# Altium PCB Flight Controller.PcbDoc (part 1 of 3)
Units mm, origin at the board's own origin, x right, y up, seen from the top; angles counter-clockwise.
Board outline 152.4 x 101.6 mm, 22 copper layers (F.Cu, F.Mask, B.Cu, B.Mask, In1.Cu, F.SilkS, In2.Cu, B.SilkS, In3.Cu, F.Adhes, In4.Cu, B.Adhes, F.Paste, B.Paste, Dwgs.User, Cmts.User, Eco1.User, Eco2.User, Edge.Cuts, Margin, B.CrtYd, F.CrtYd); 168 components, 0 nets, 572 pads, 361 vias.
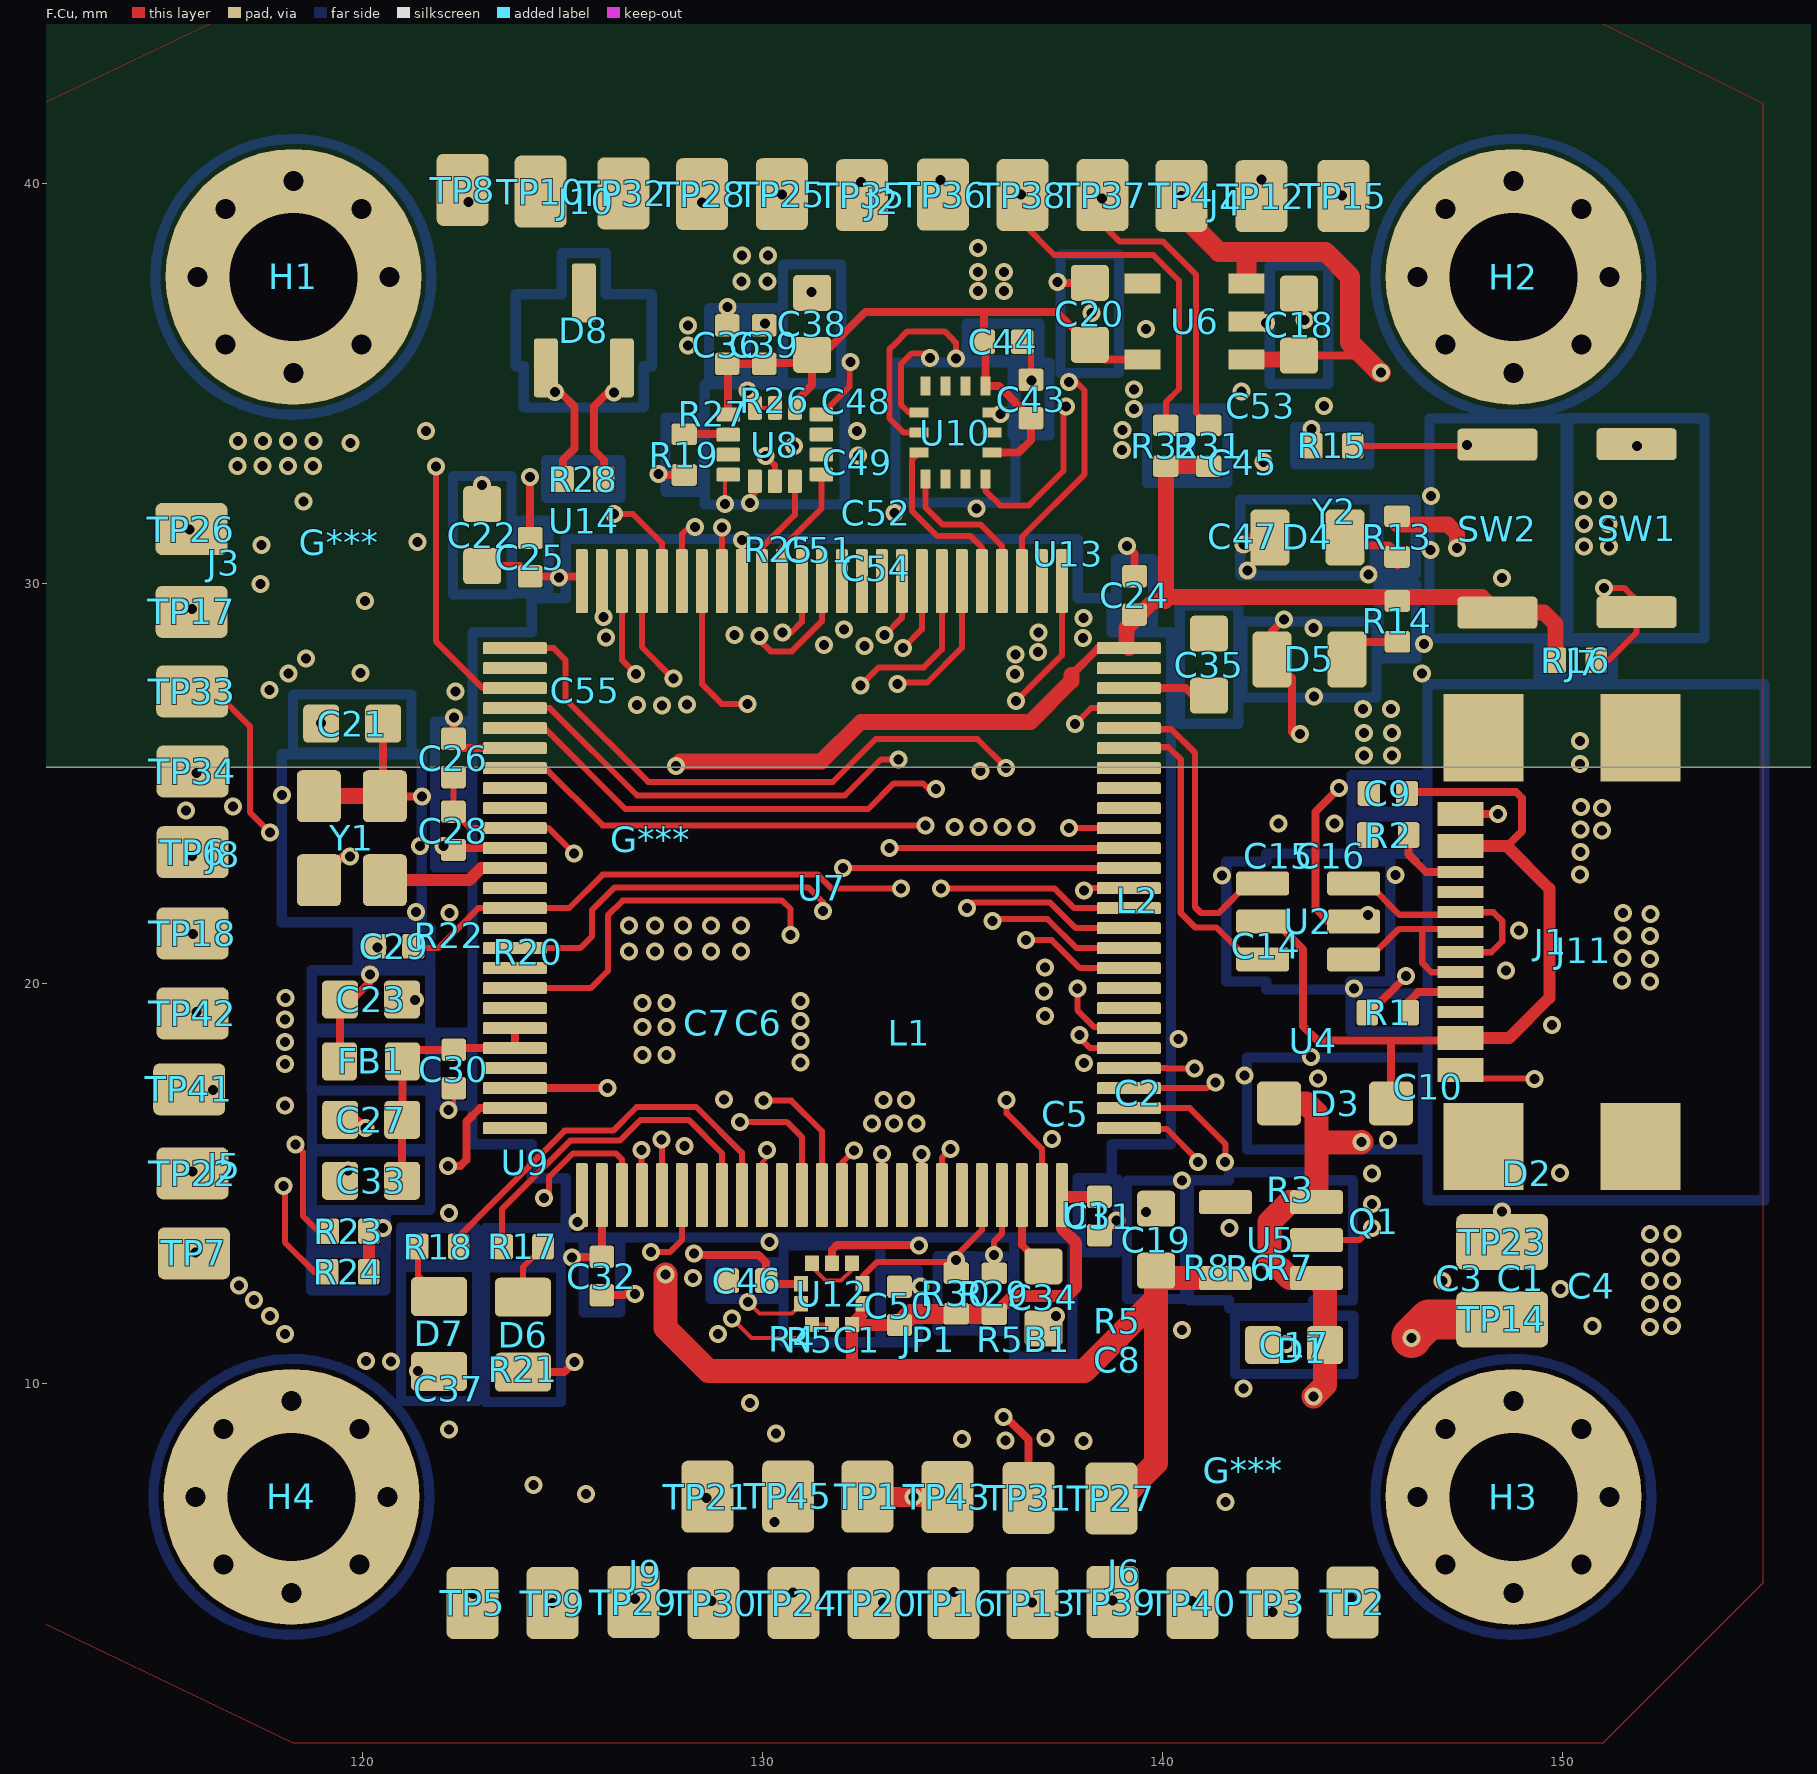
[diagram p0: F.Cu view]
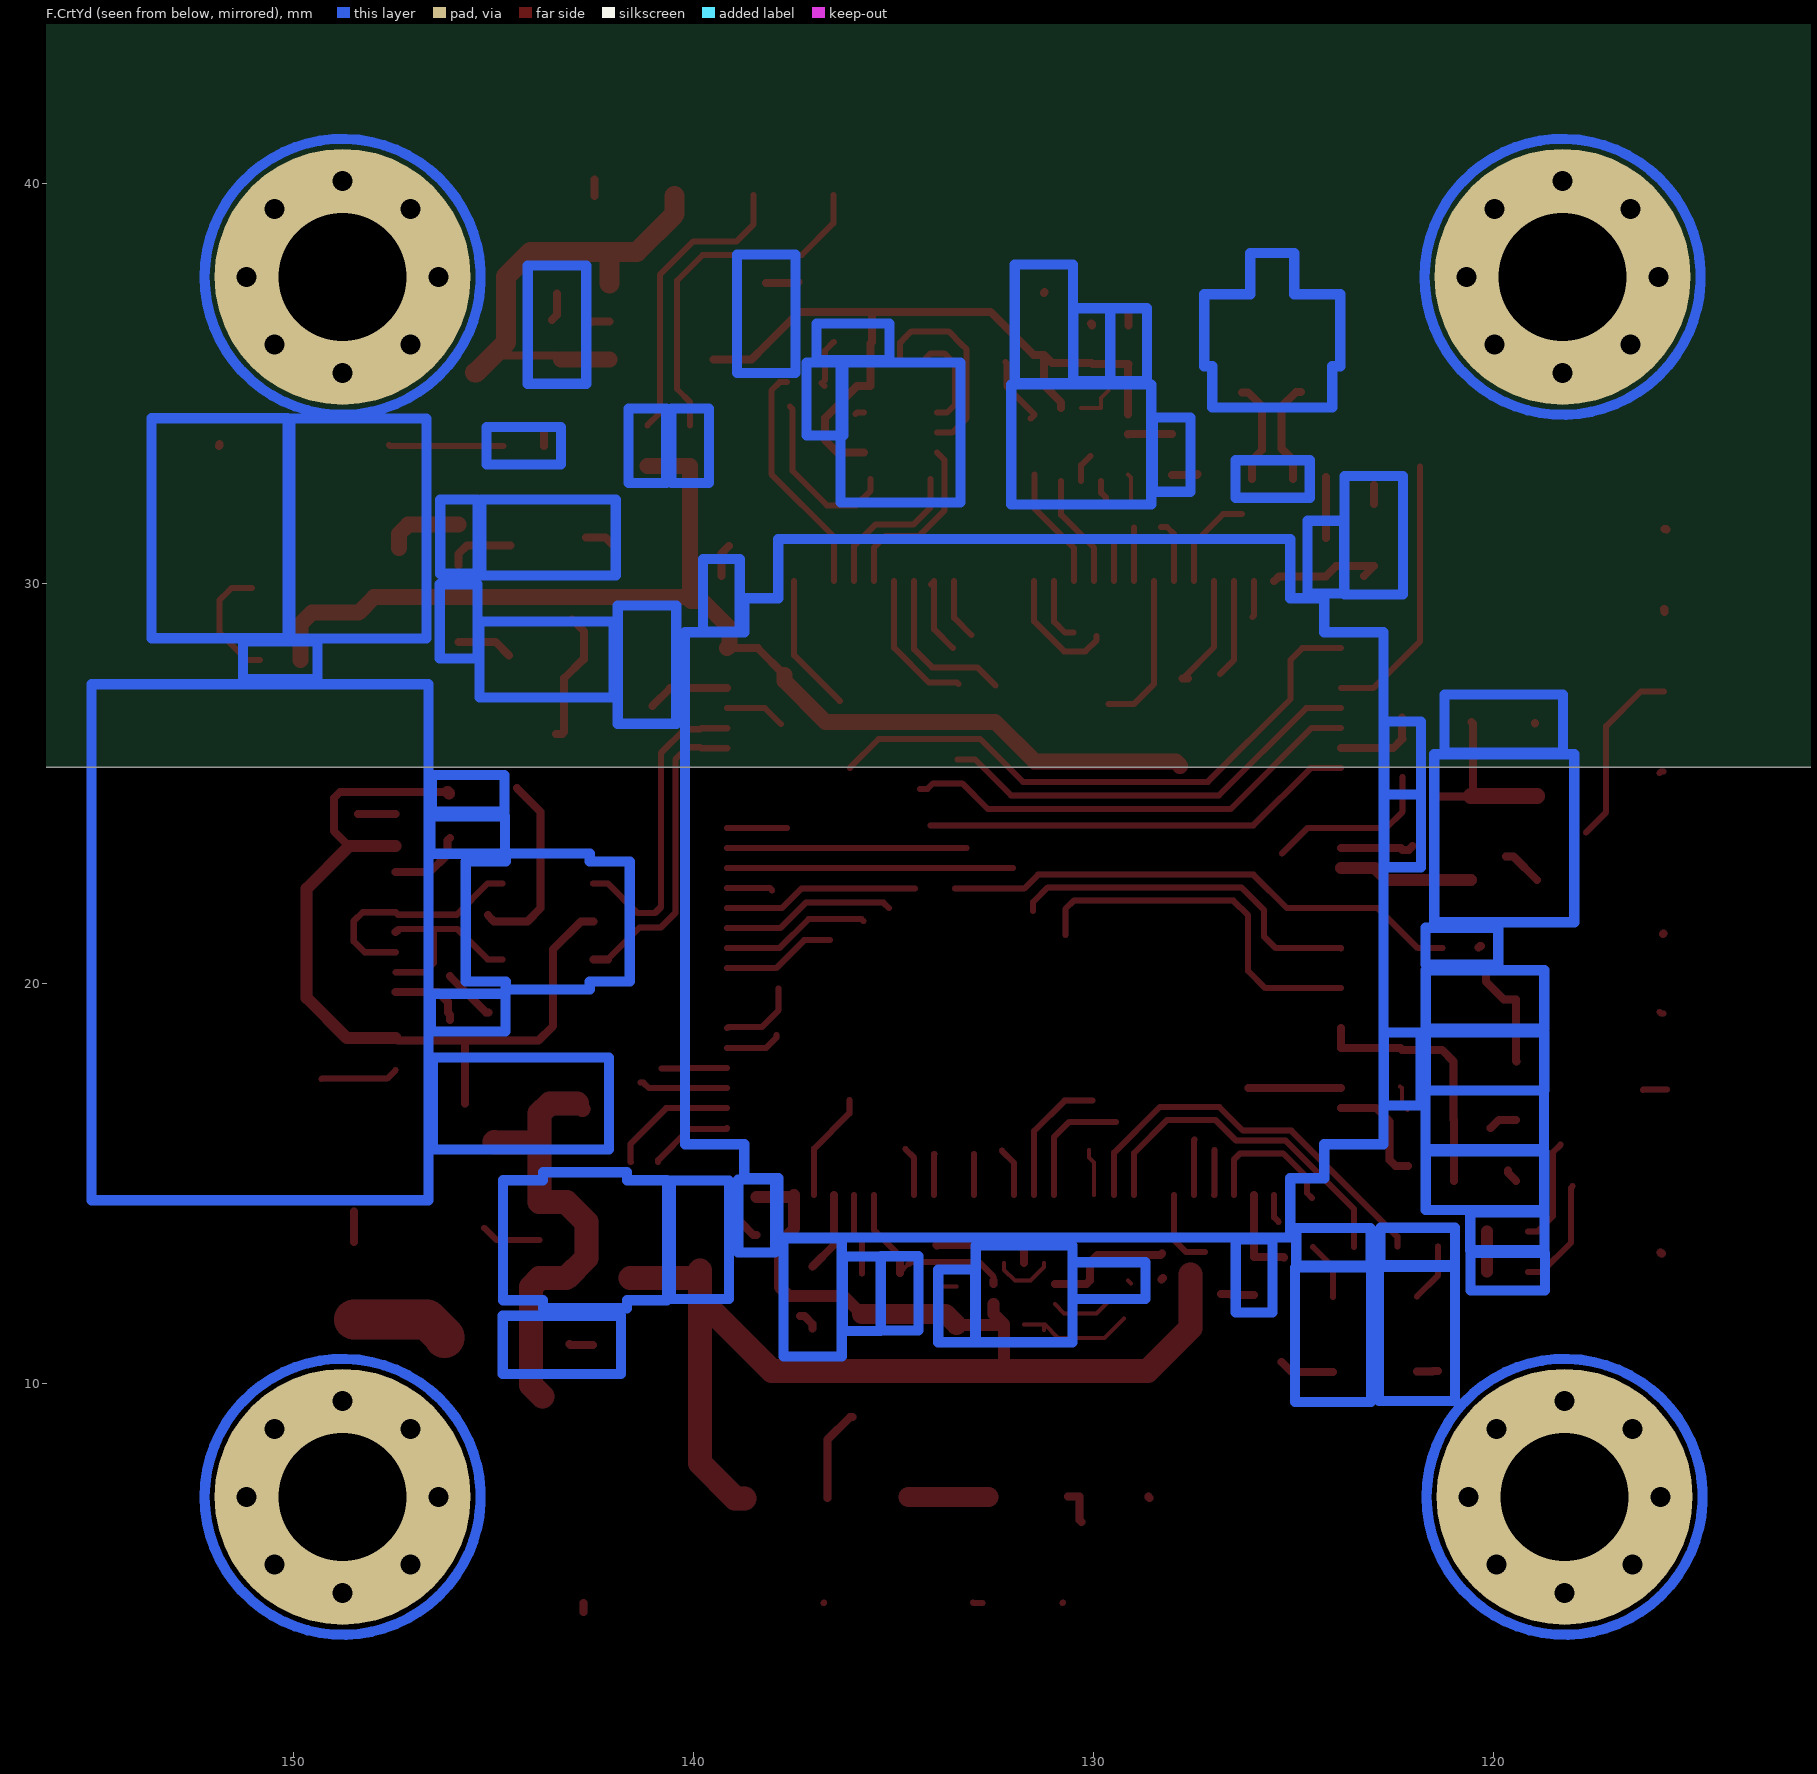
[diagram p1: F.CrtYd view, seen from below]
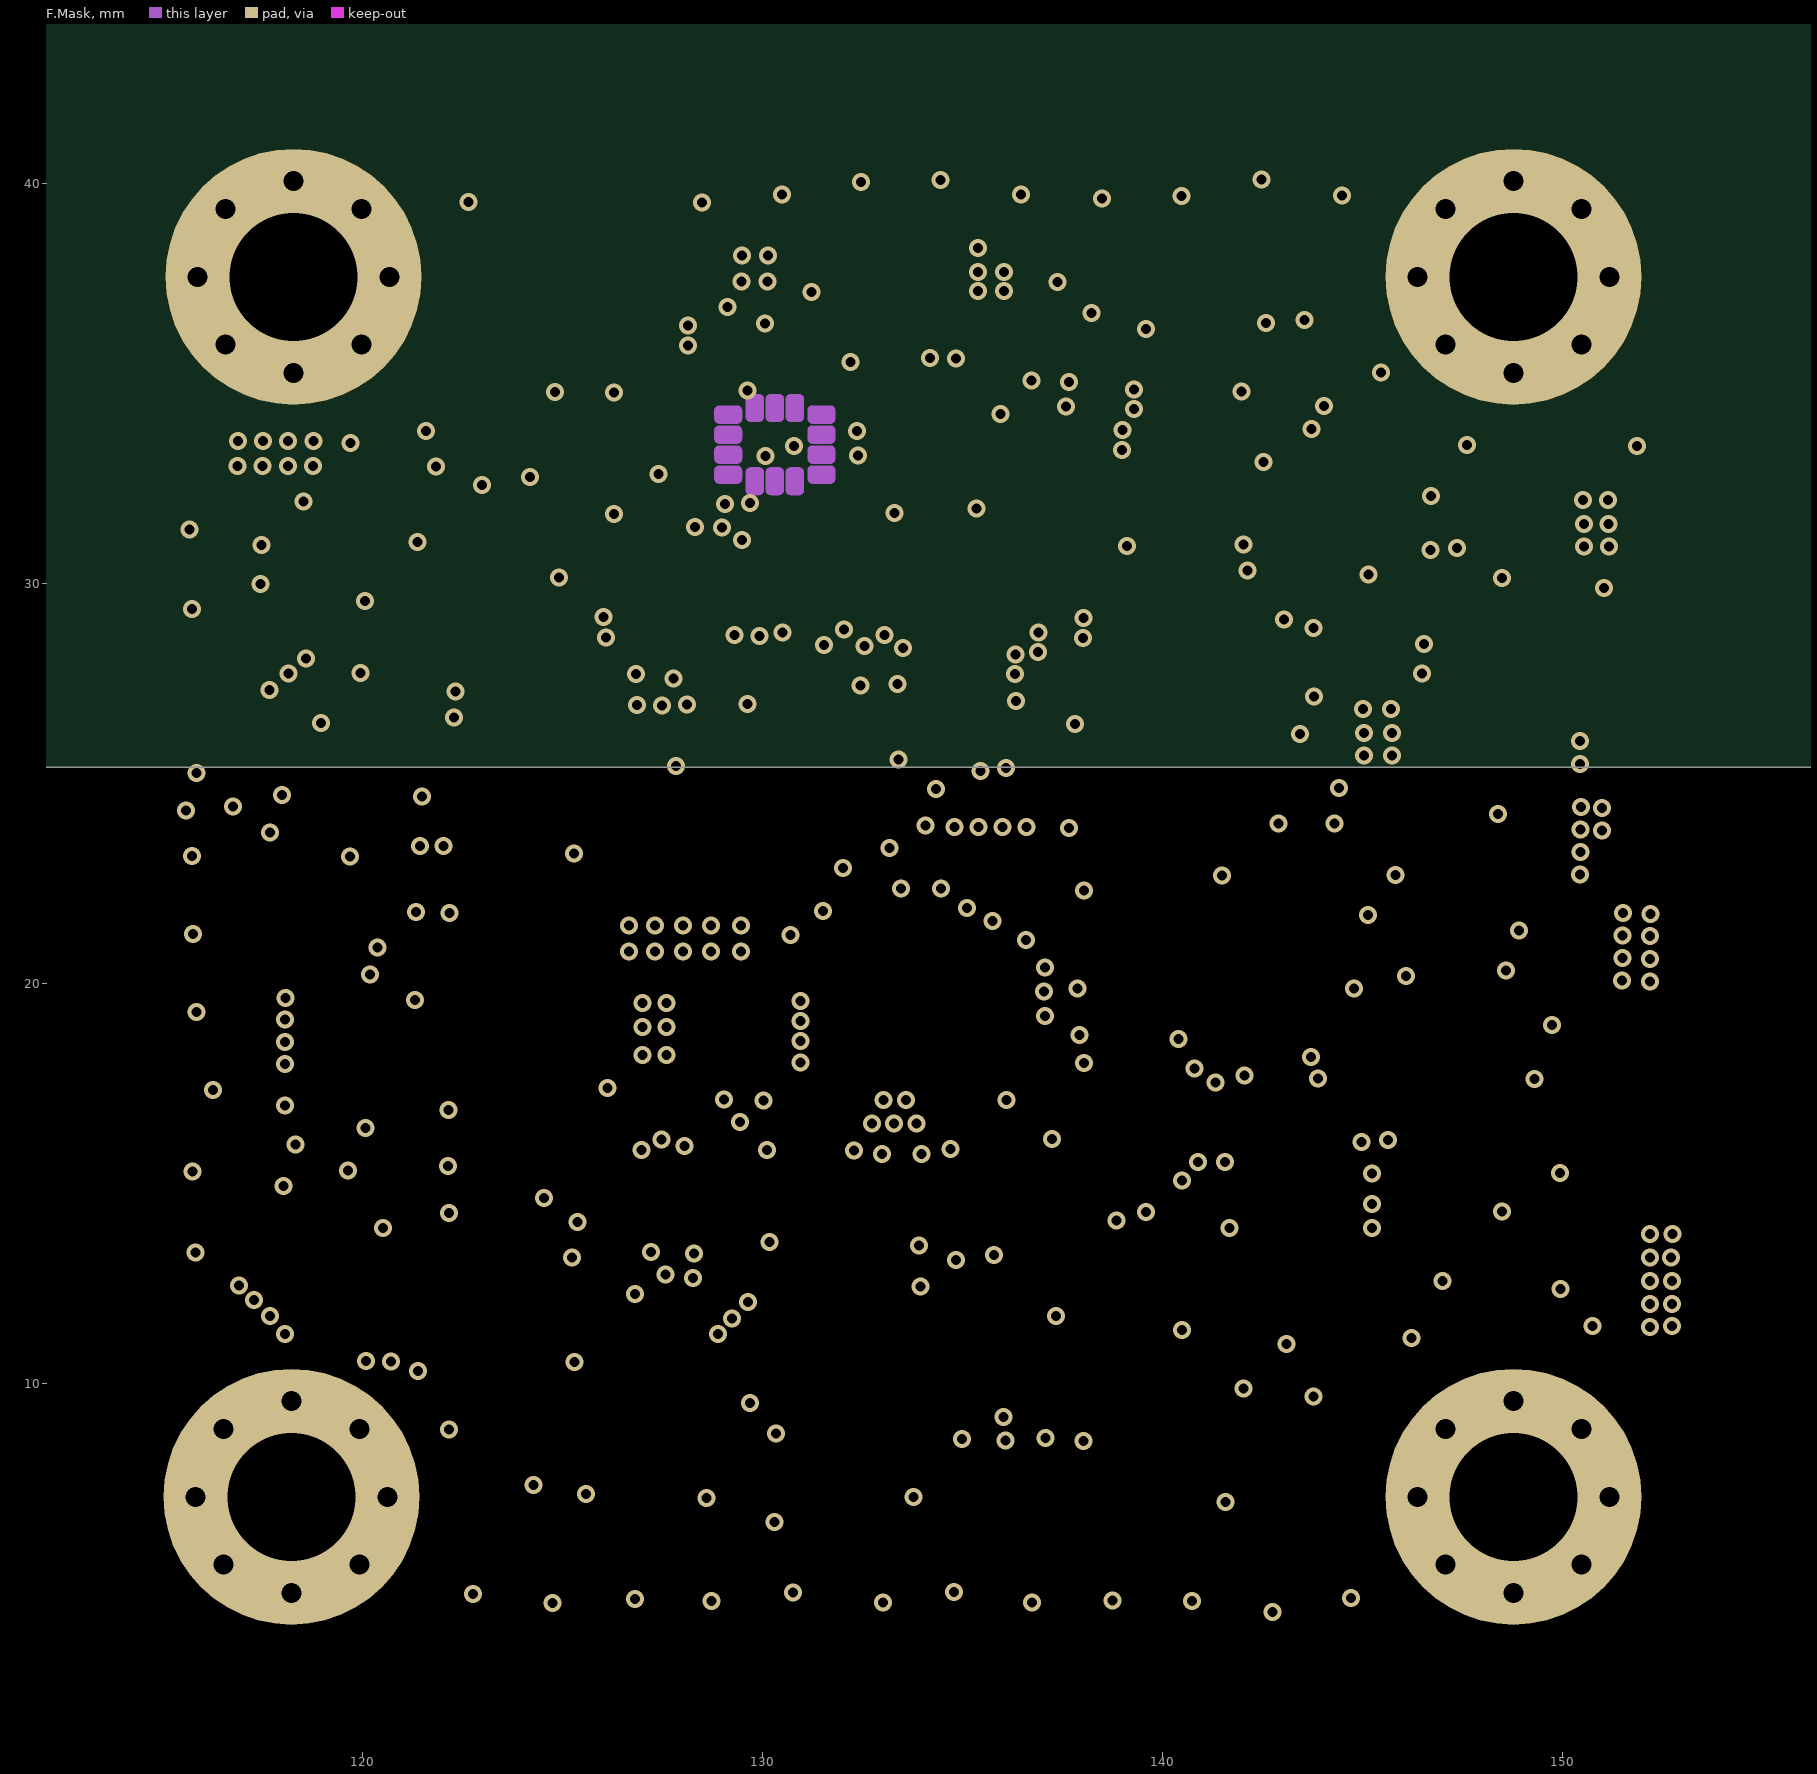
[diagram p2: F.Mask]
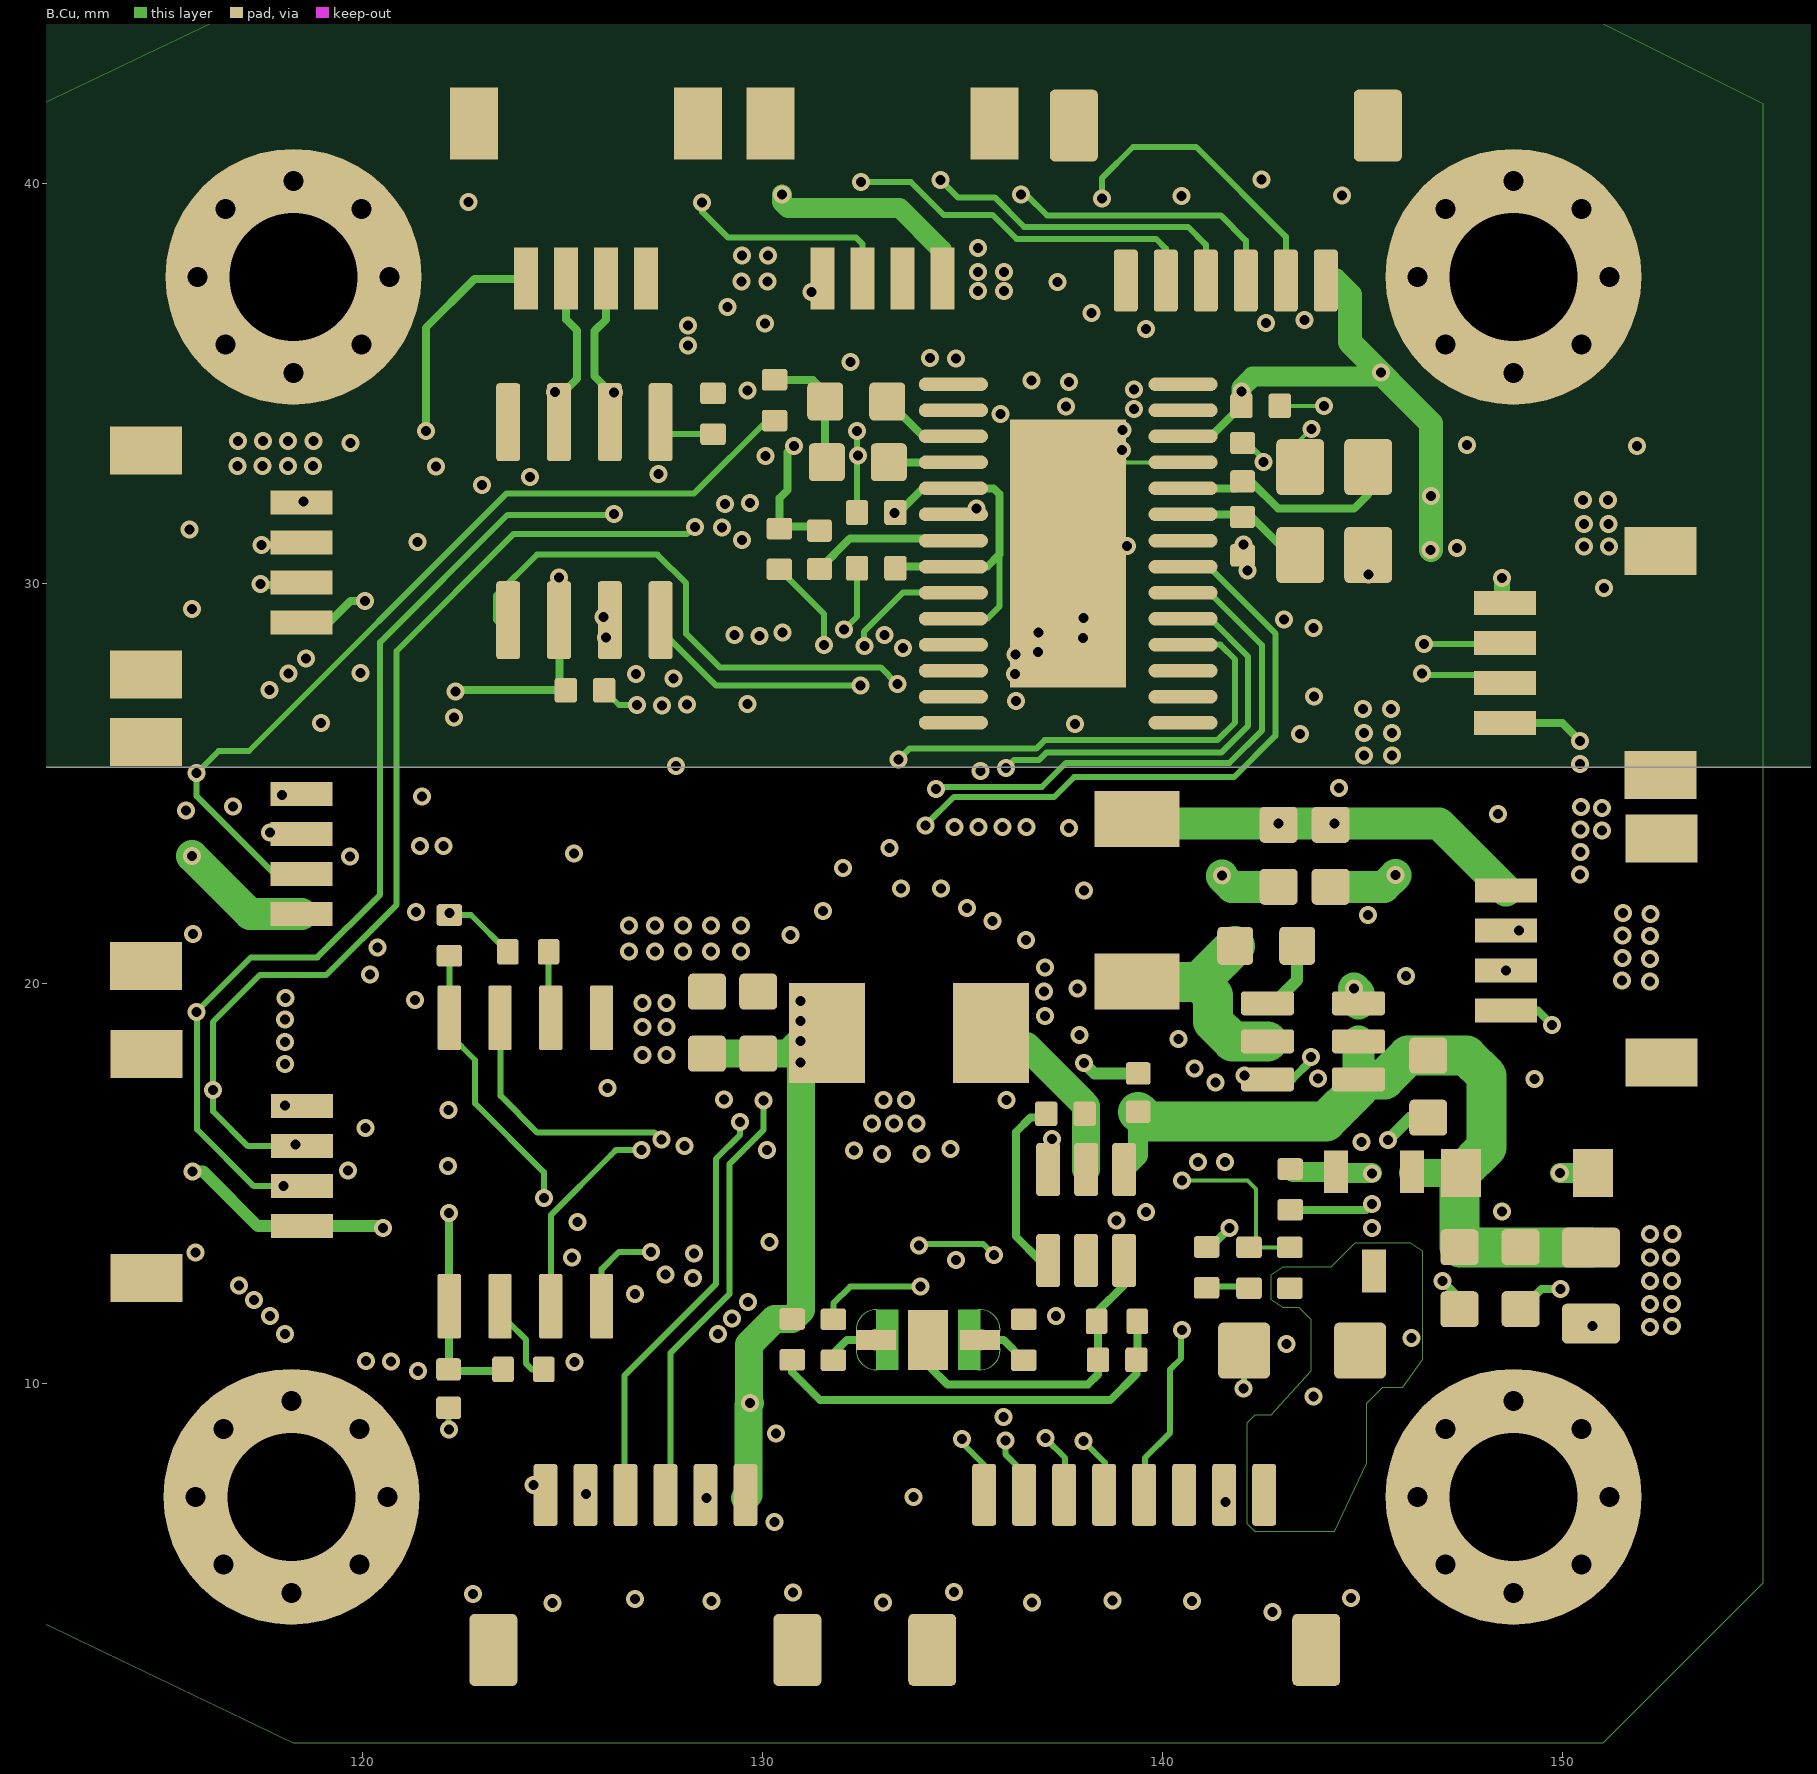
[diagram p3: B.Cu]
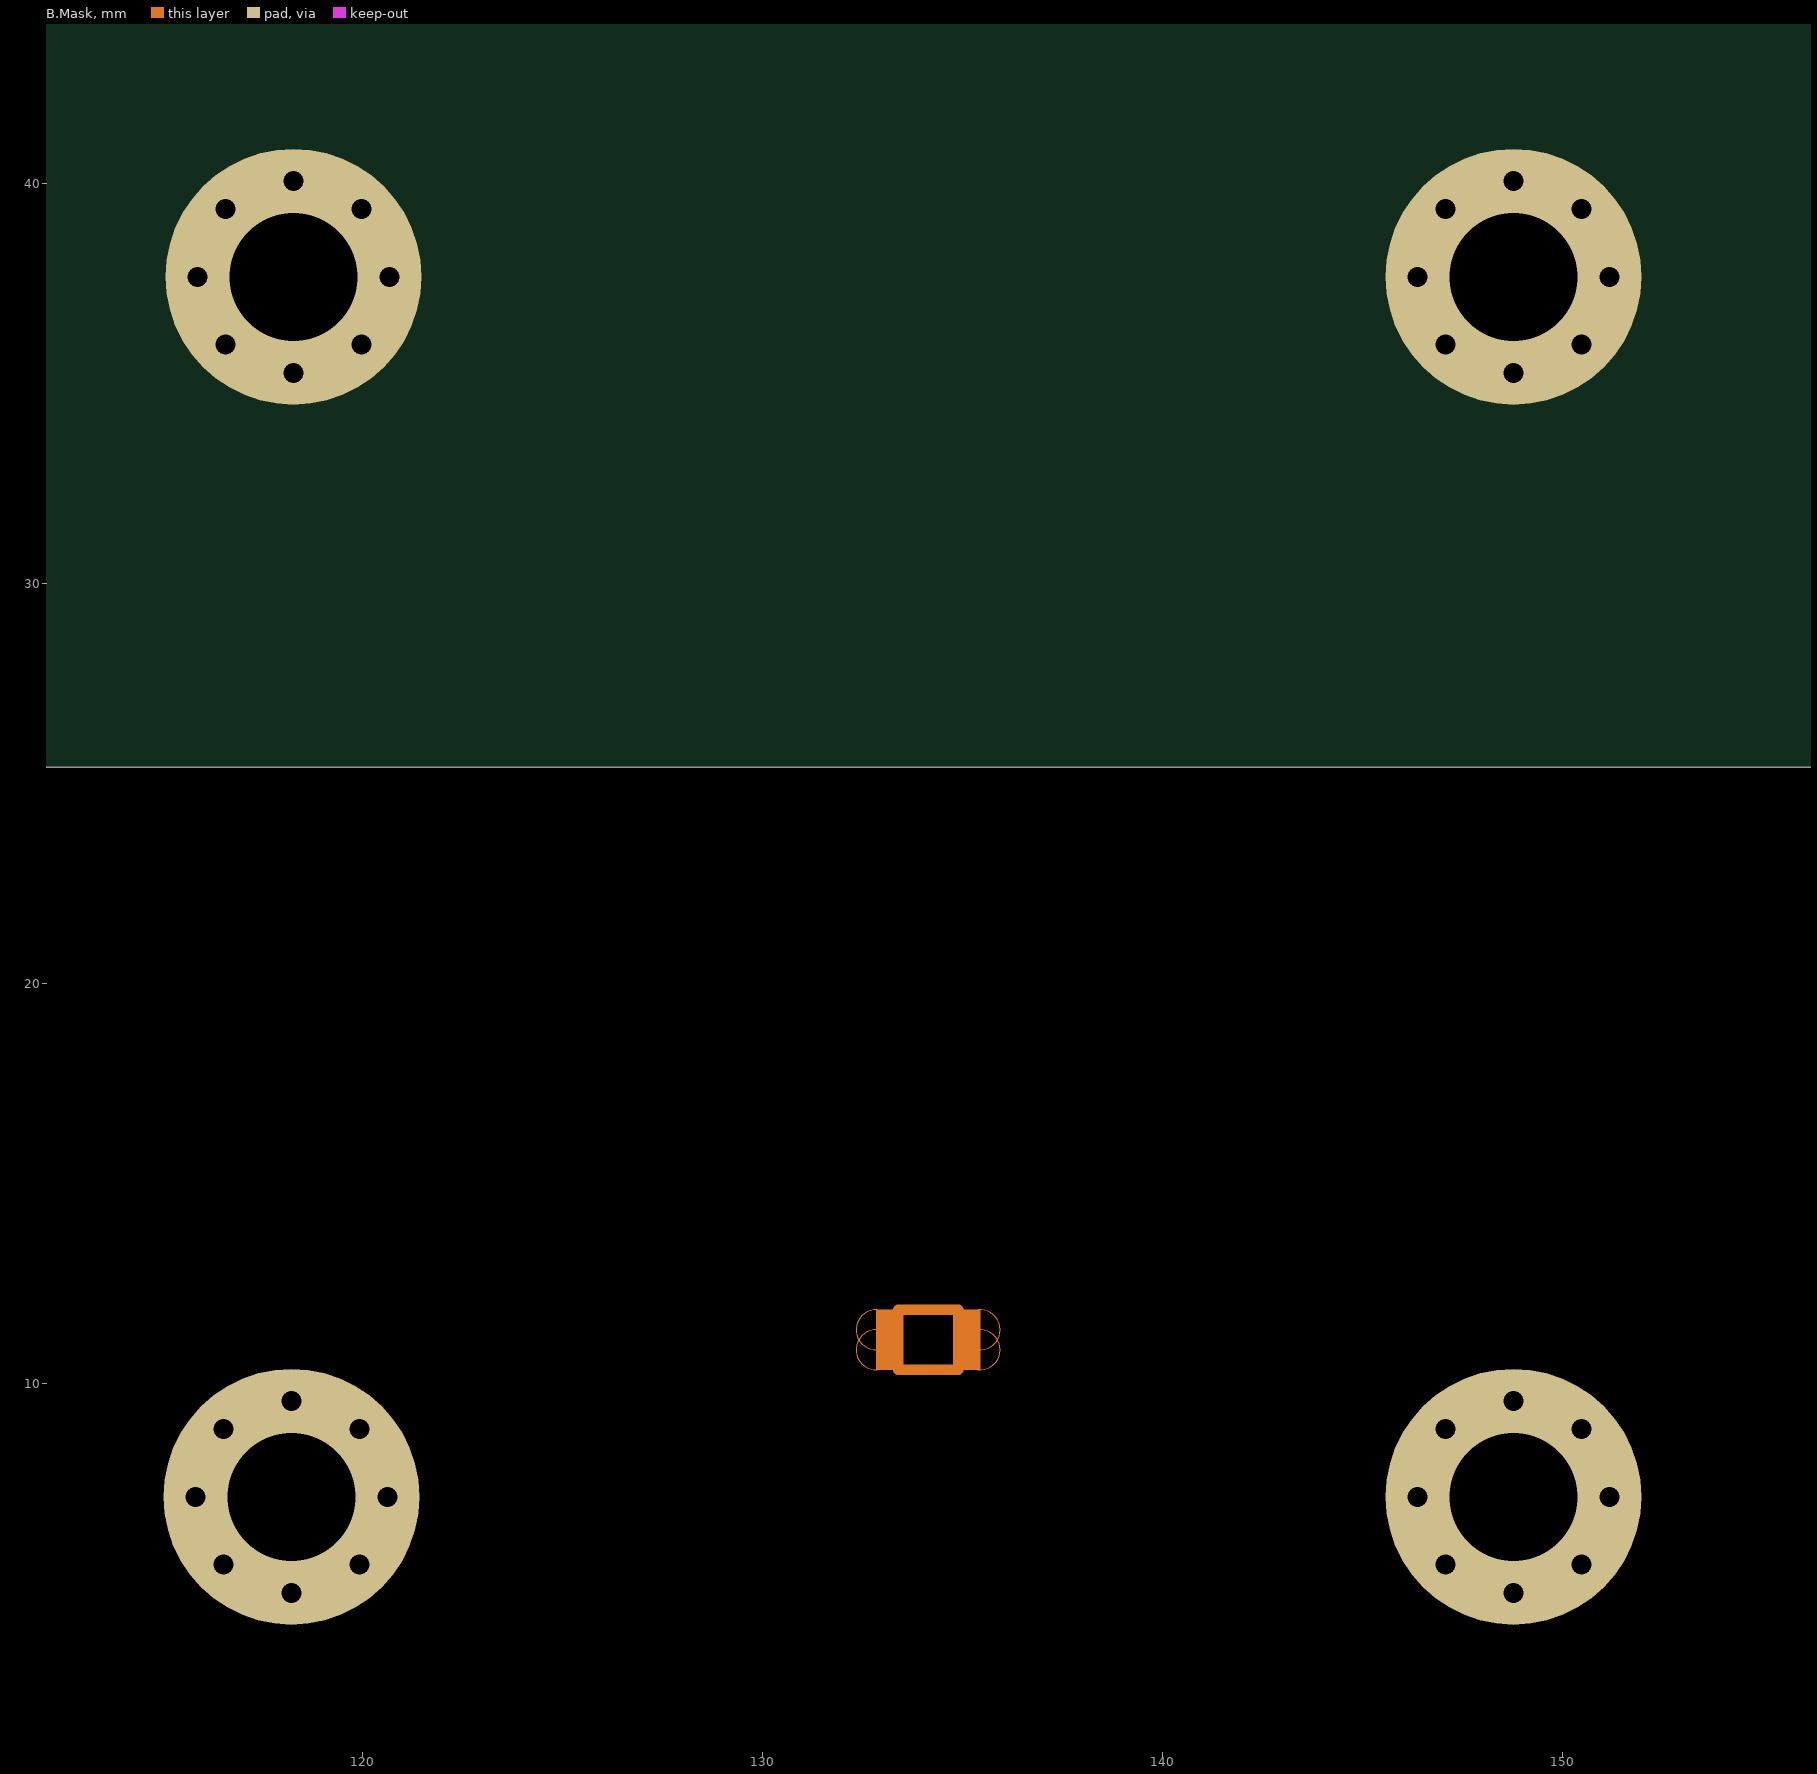
[diagram p4: B.Mask]
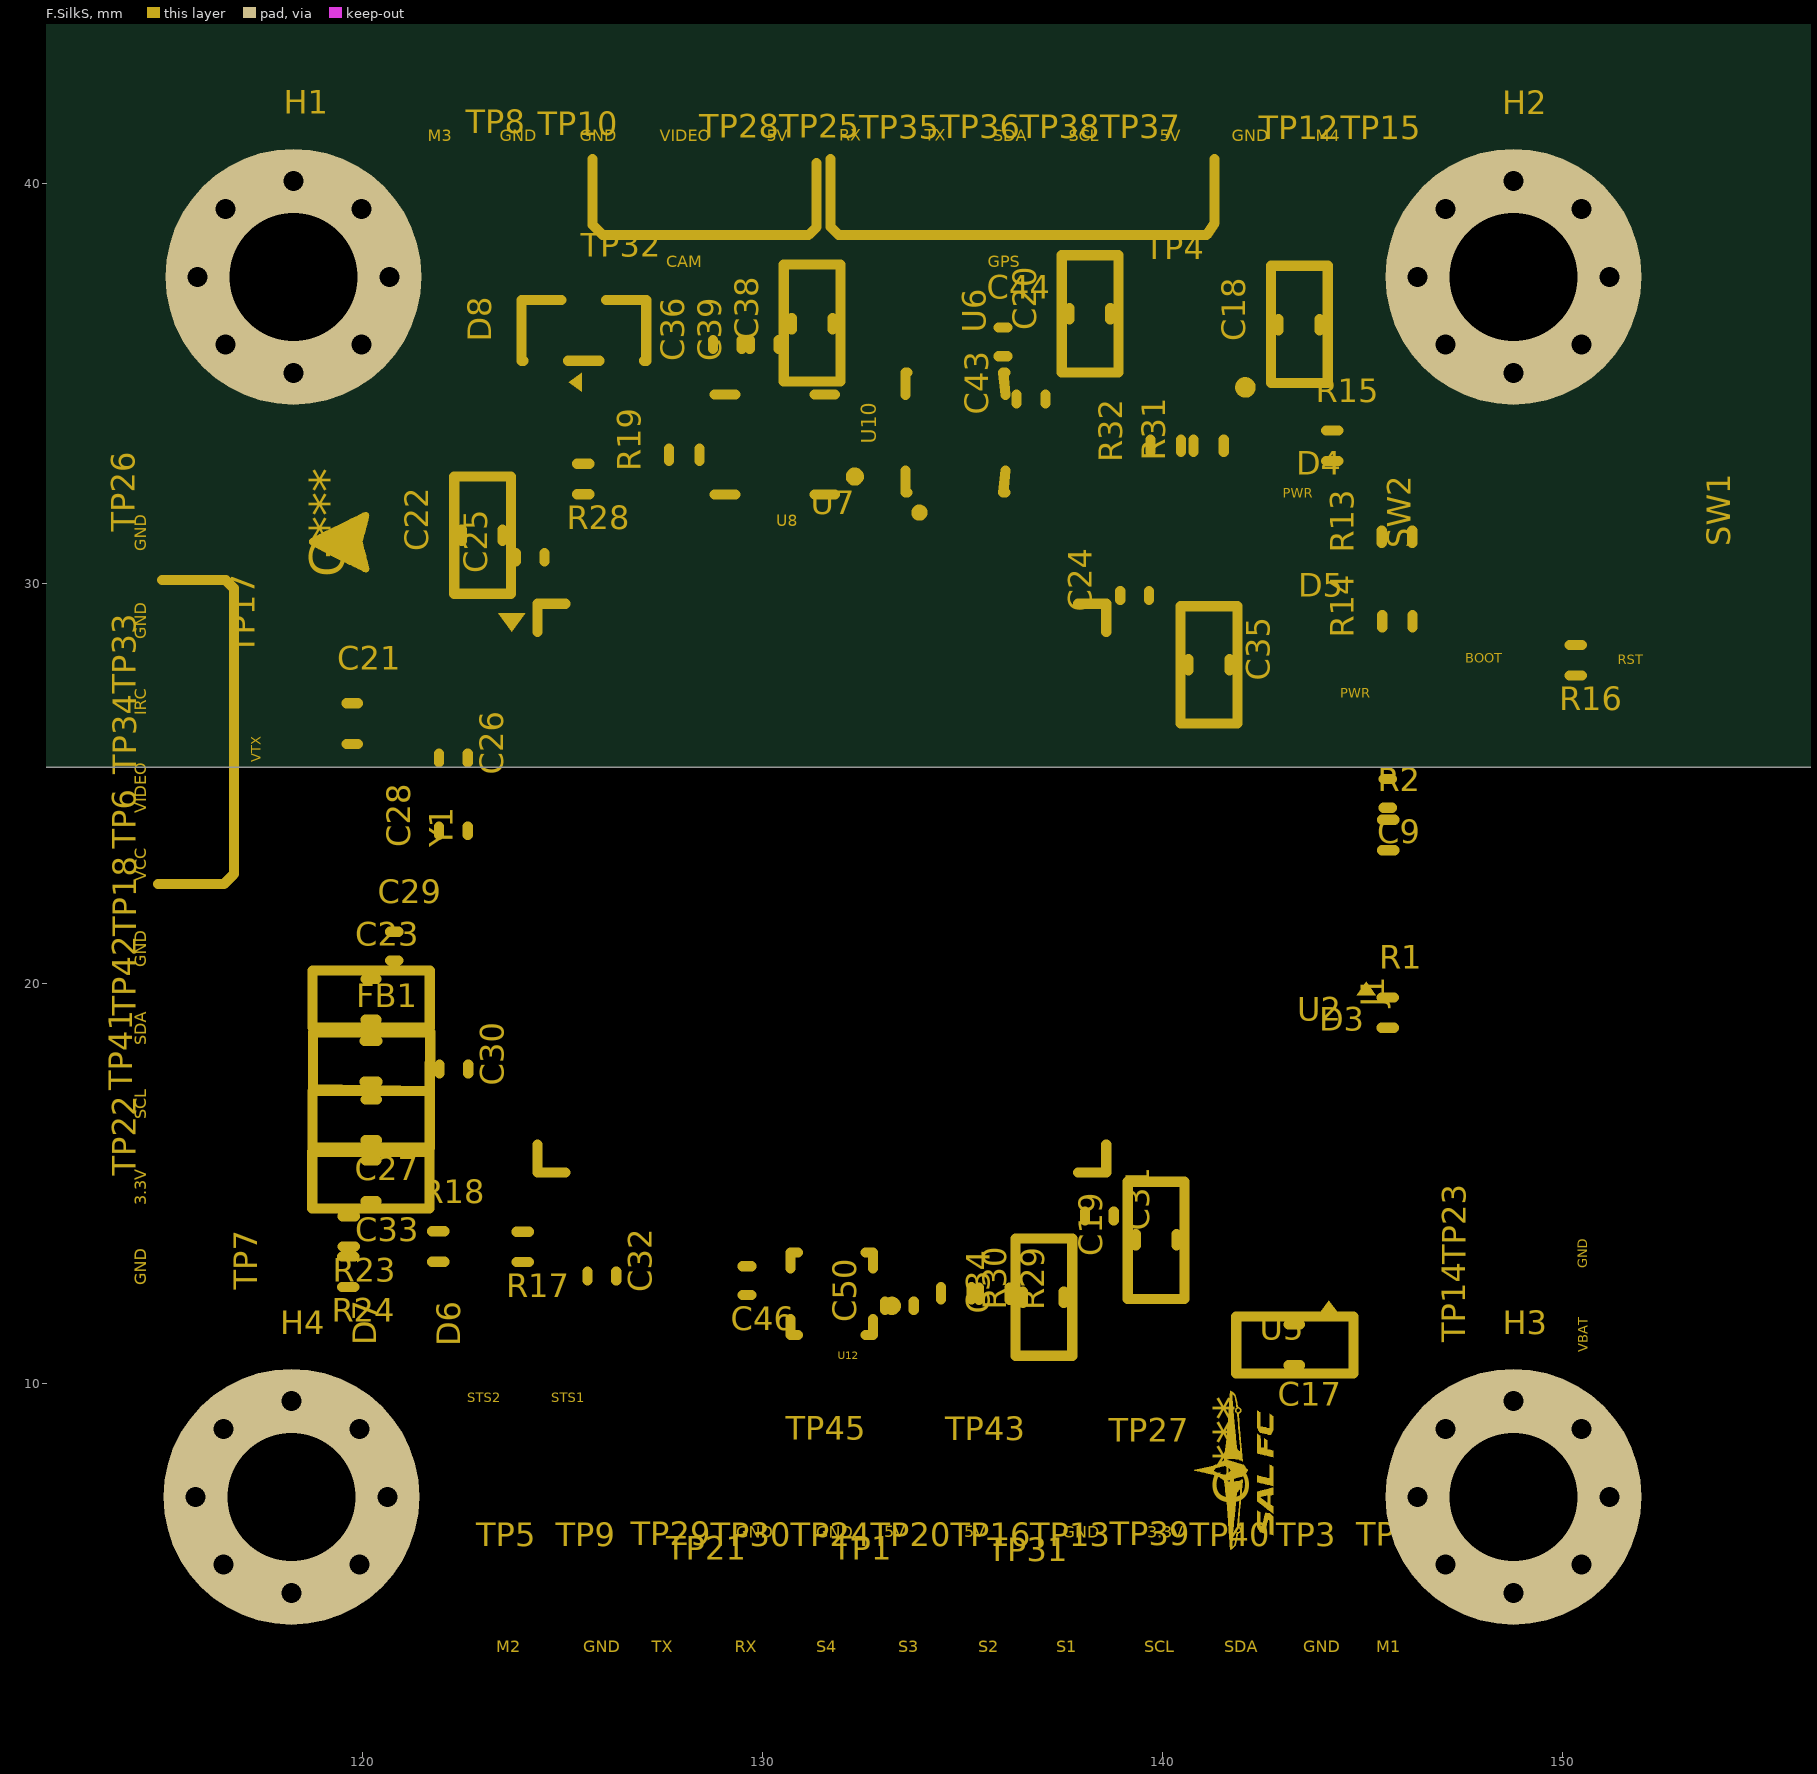
[diagram p5: F.SilkS]
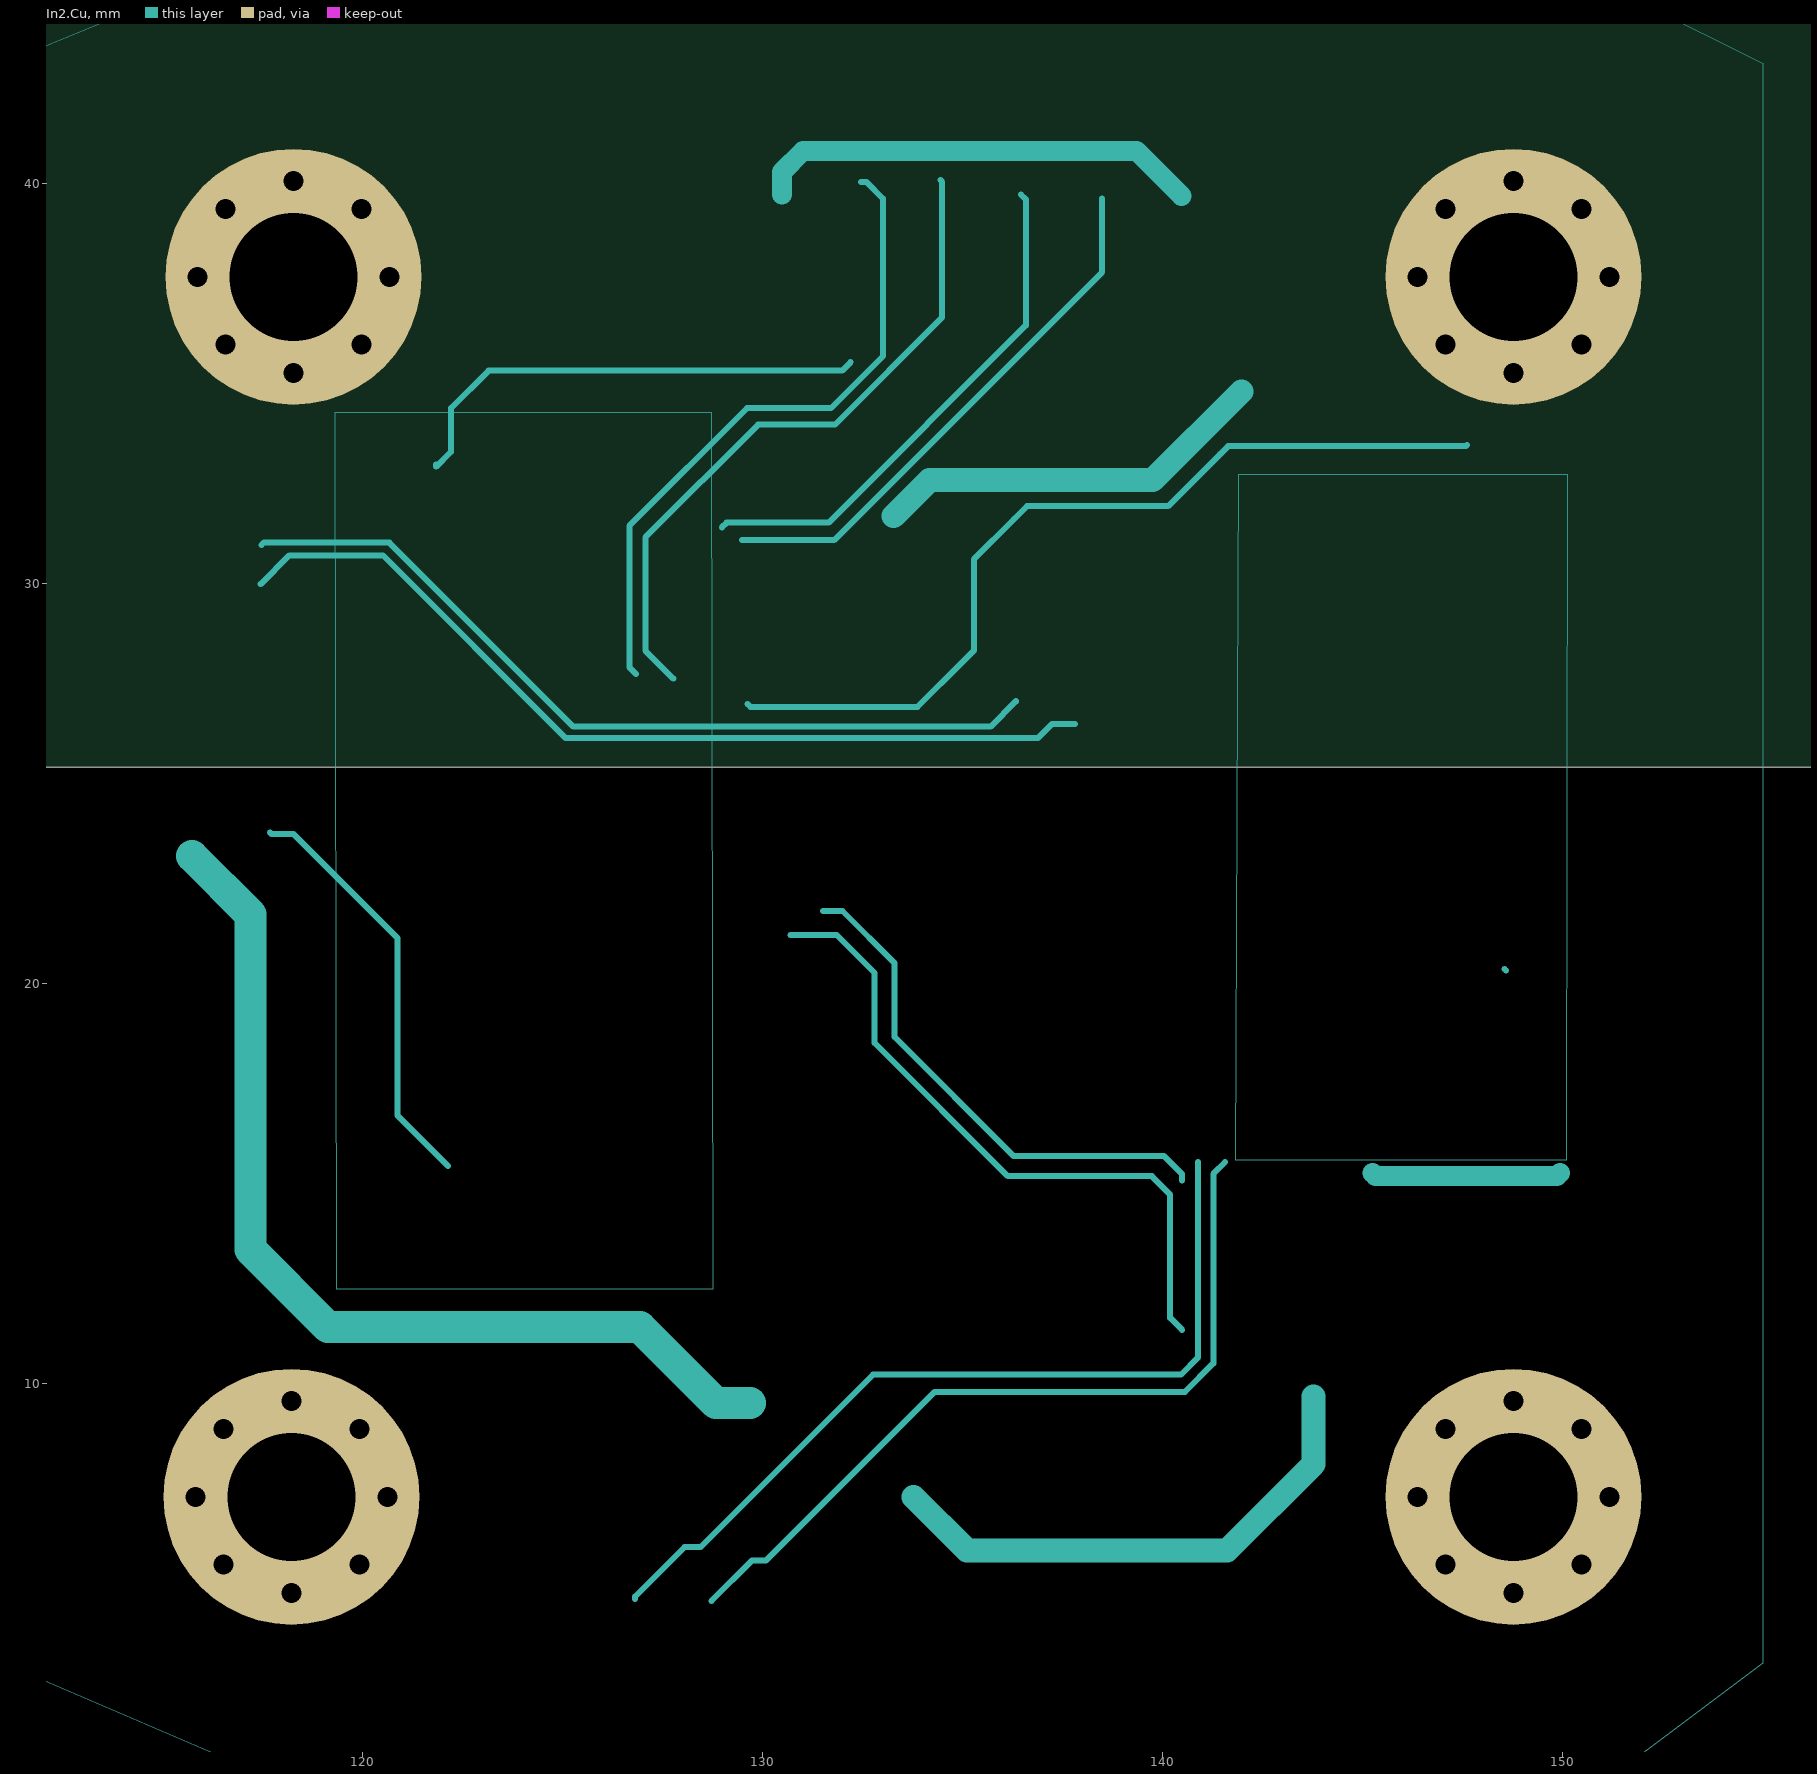
[diagram p6: In2.Cu]
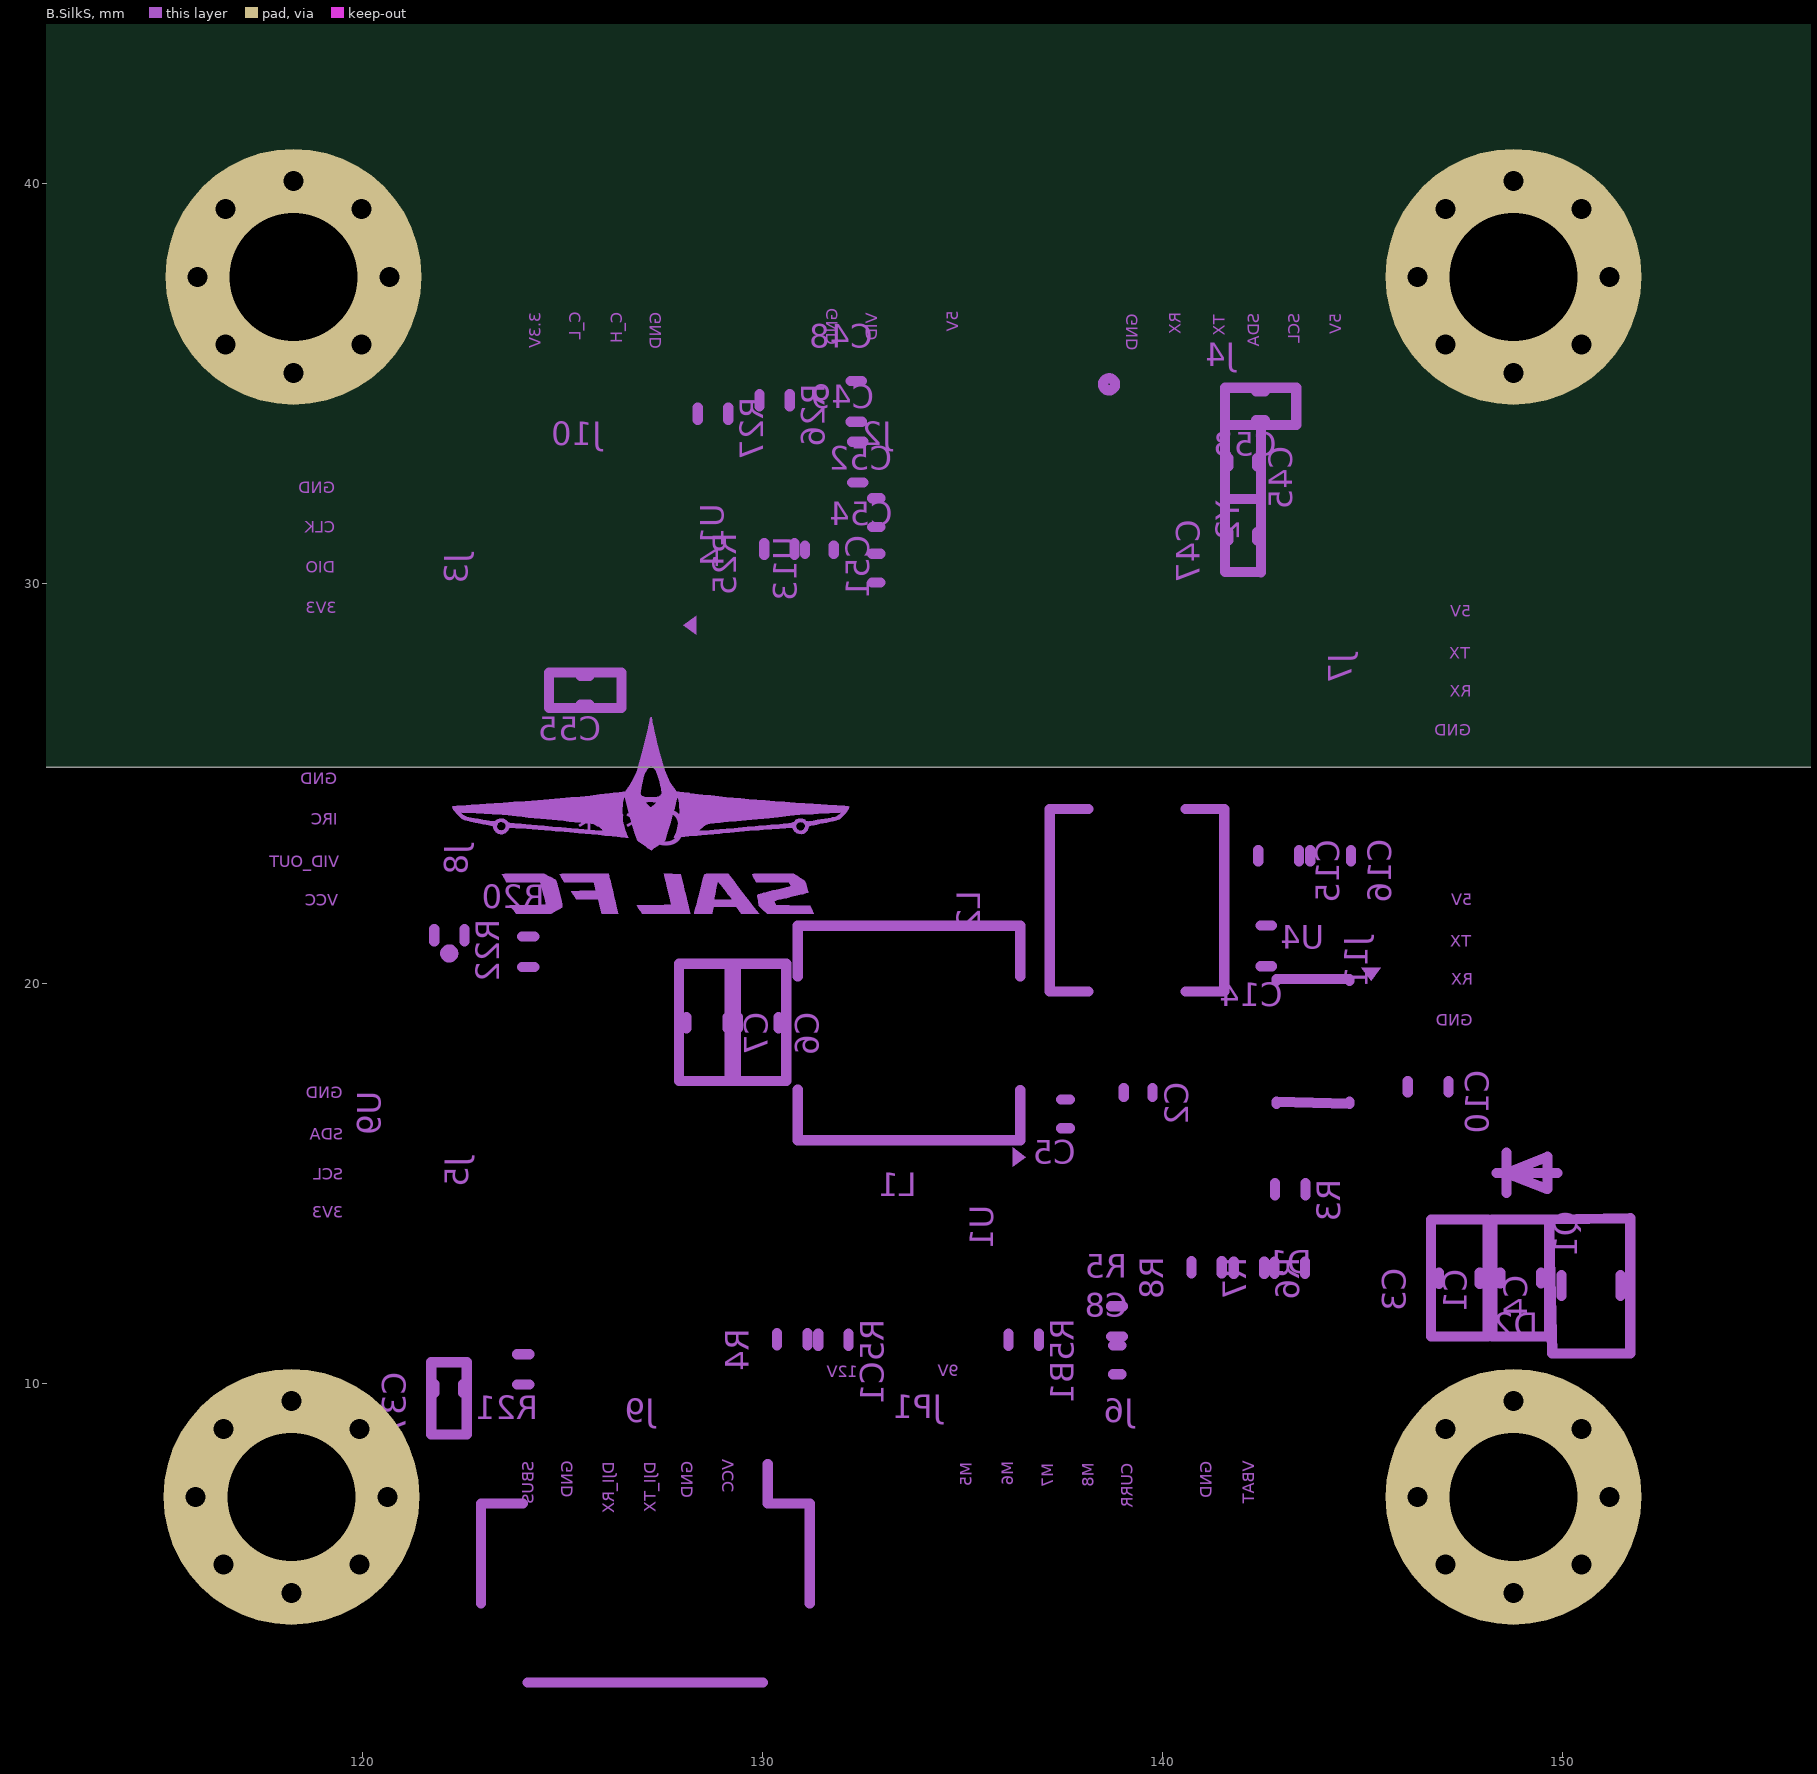
[diagram p7: B.SilkS]
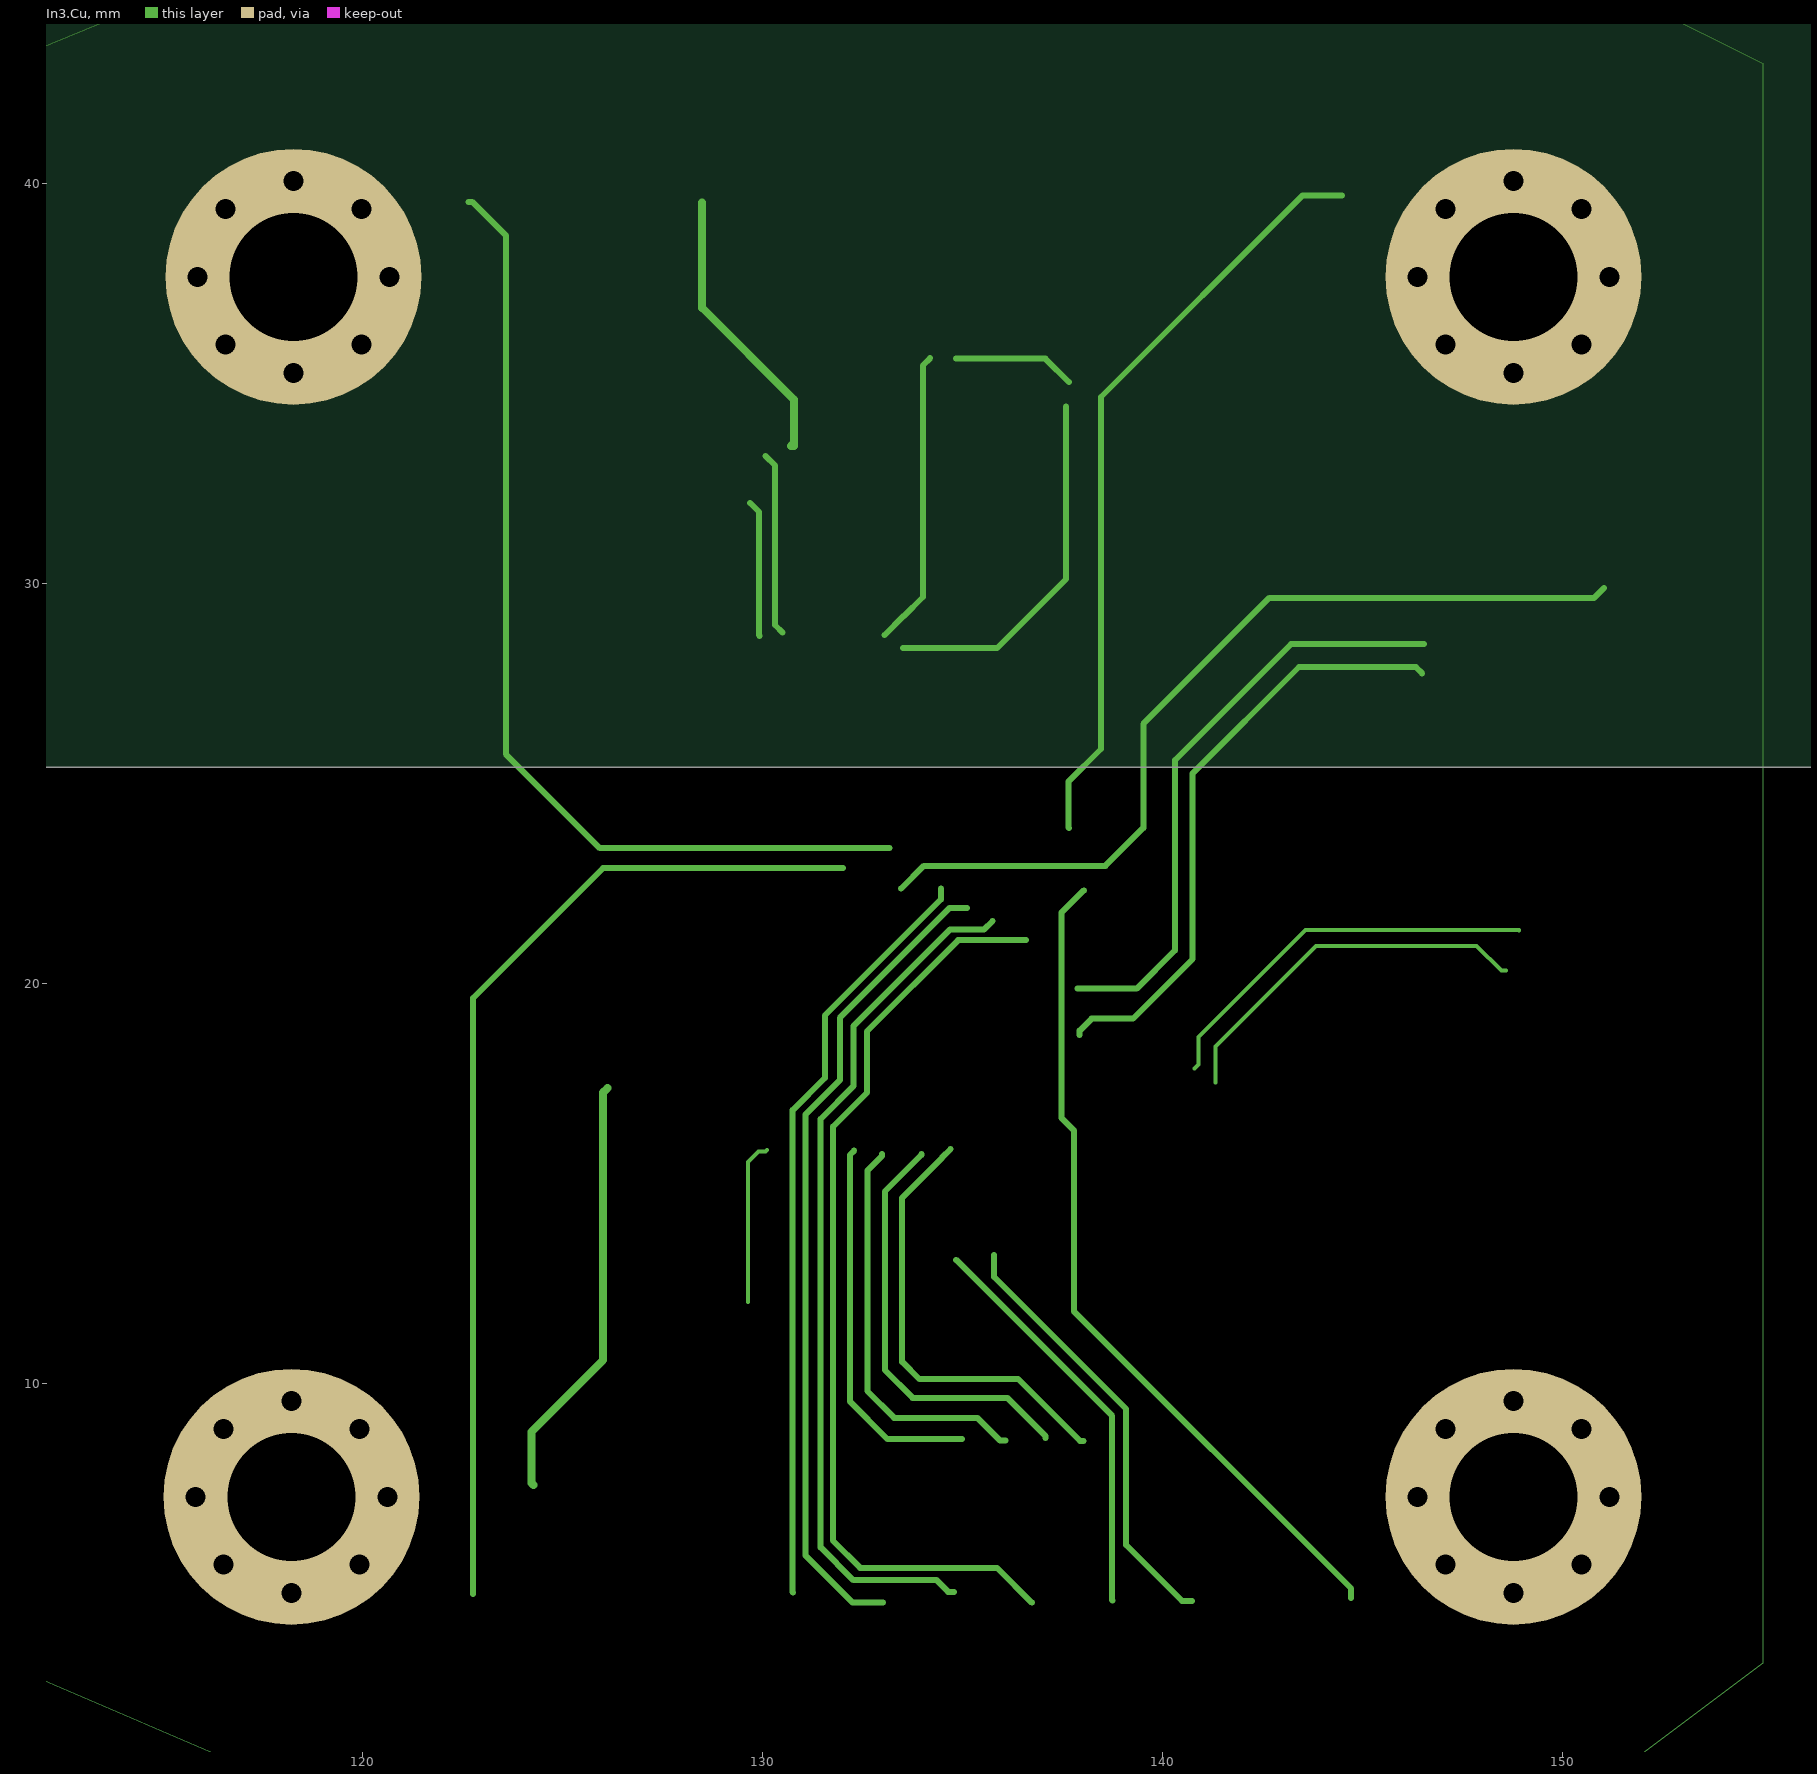
[diagram p8: In3.Cu]
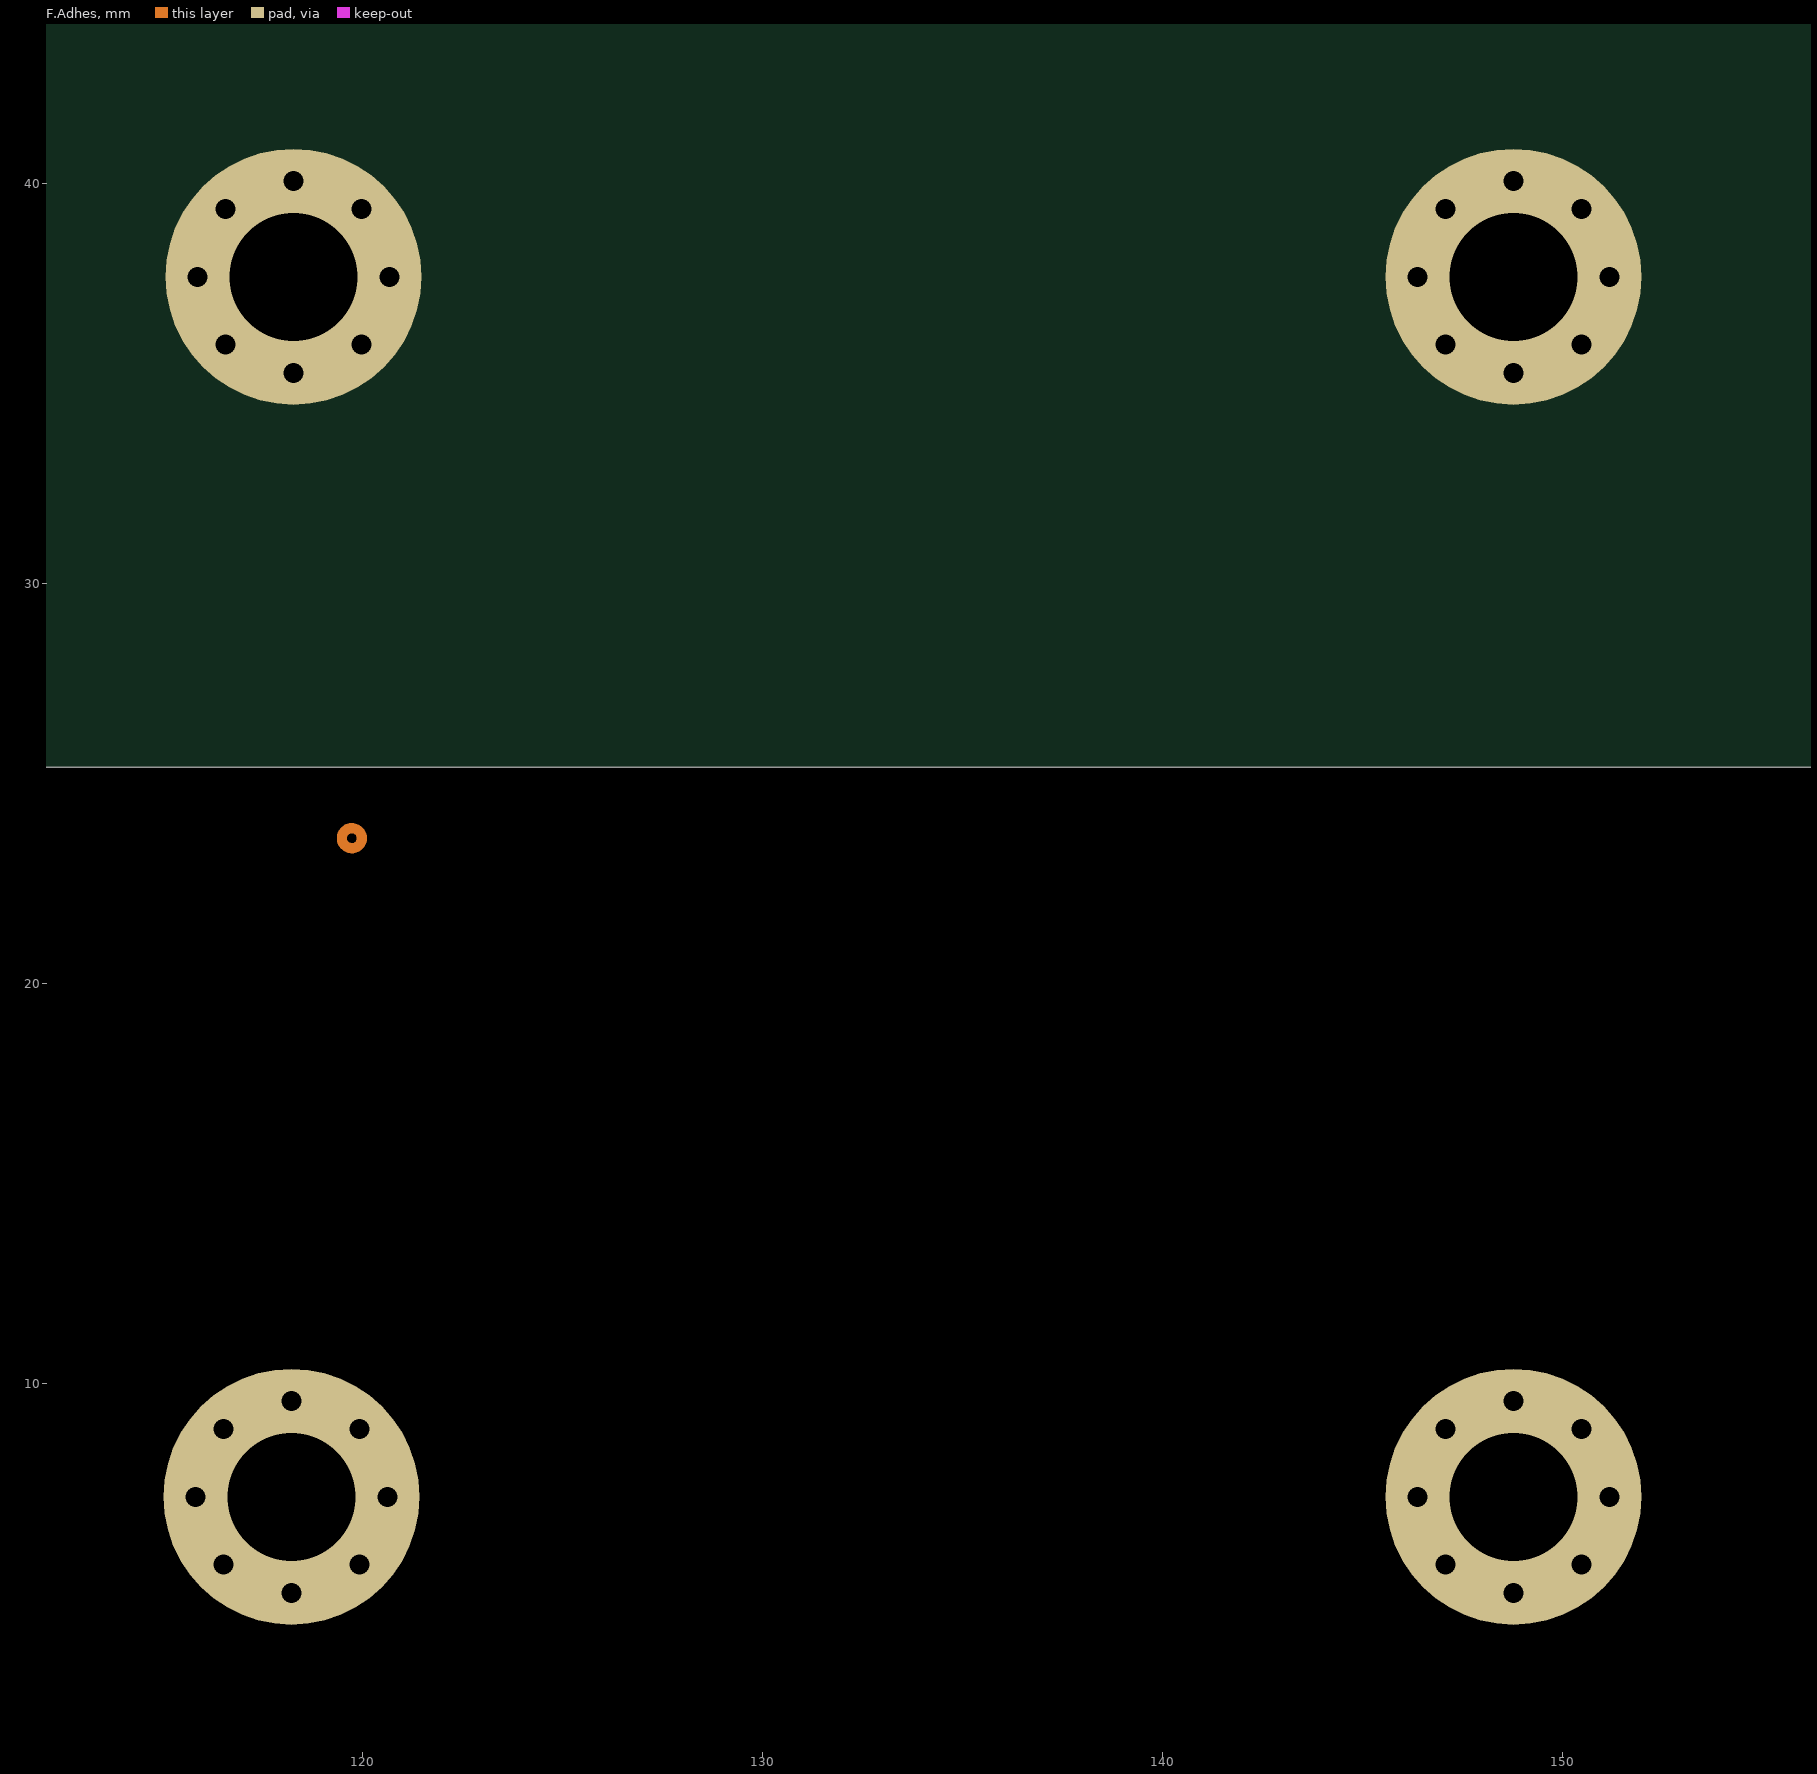
[diagram p9: F.Adhes]
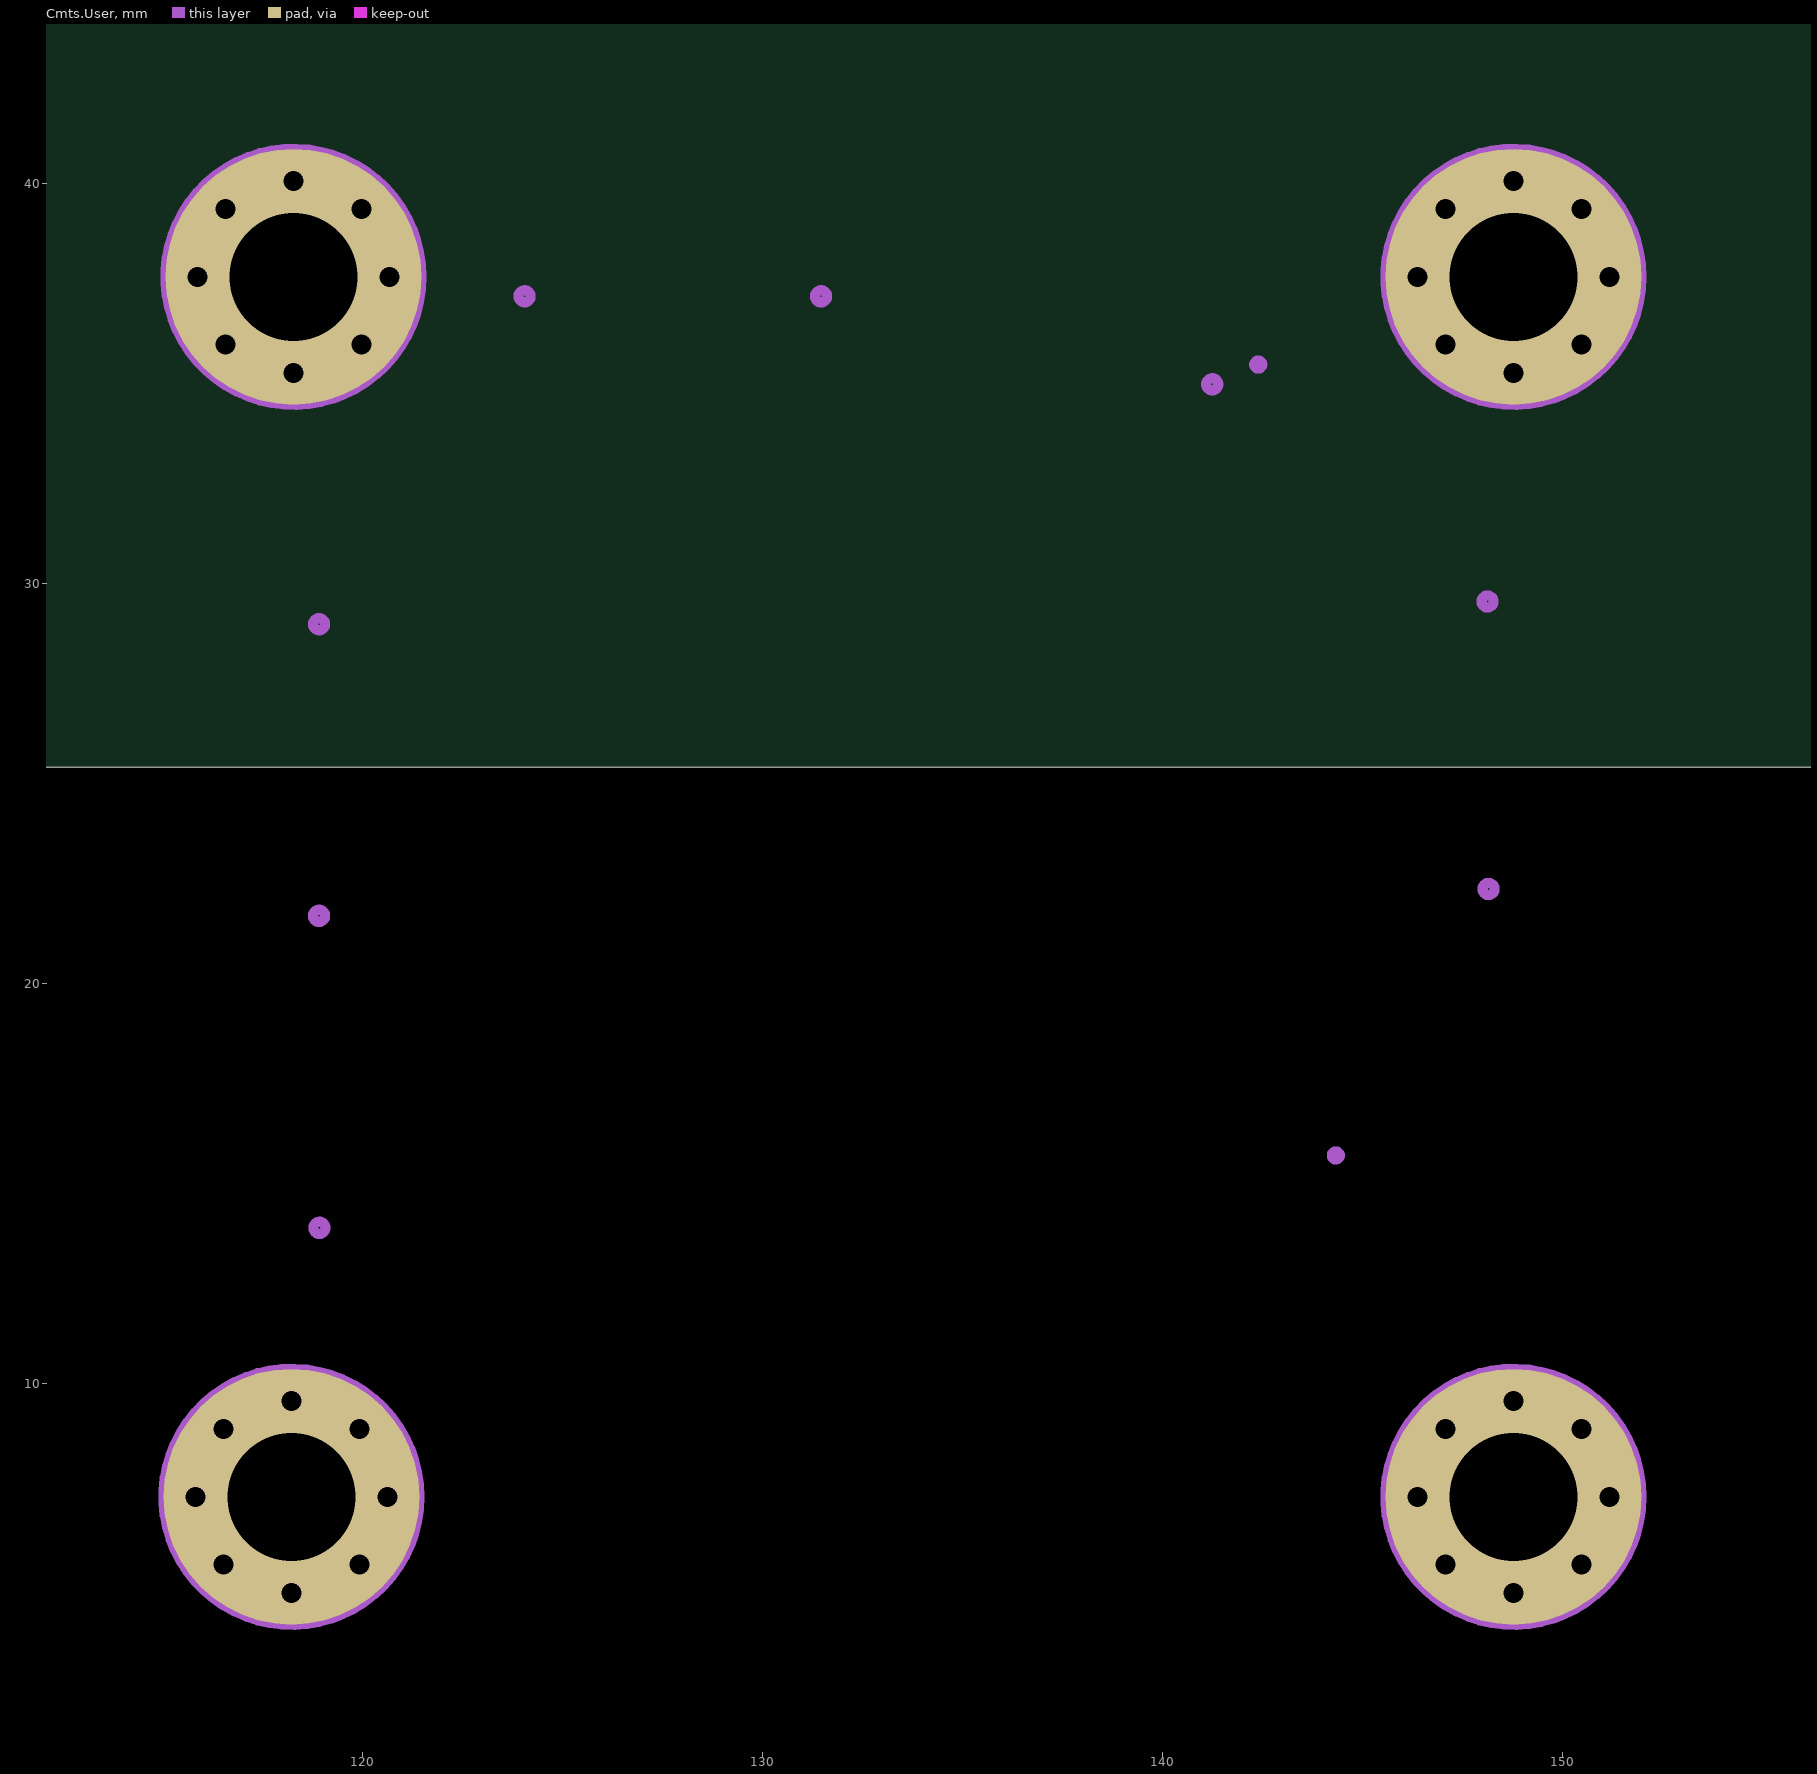
[diagram p10: Cmts.User]
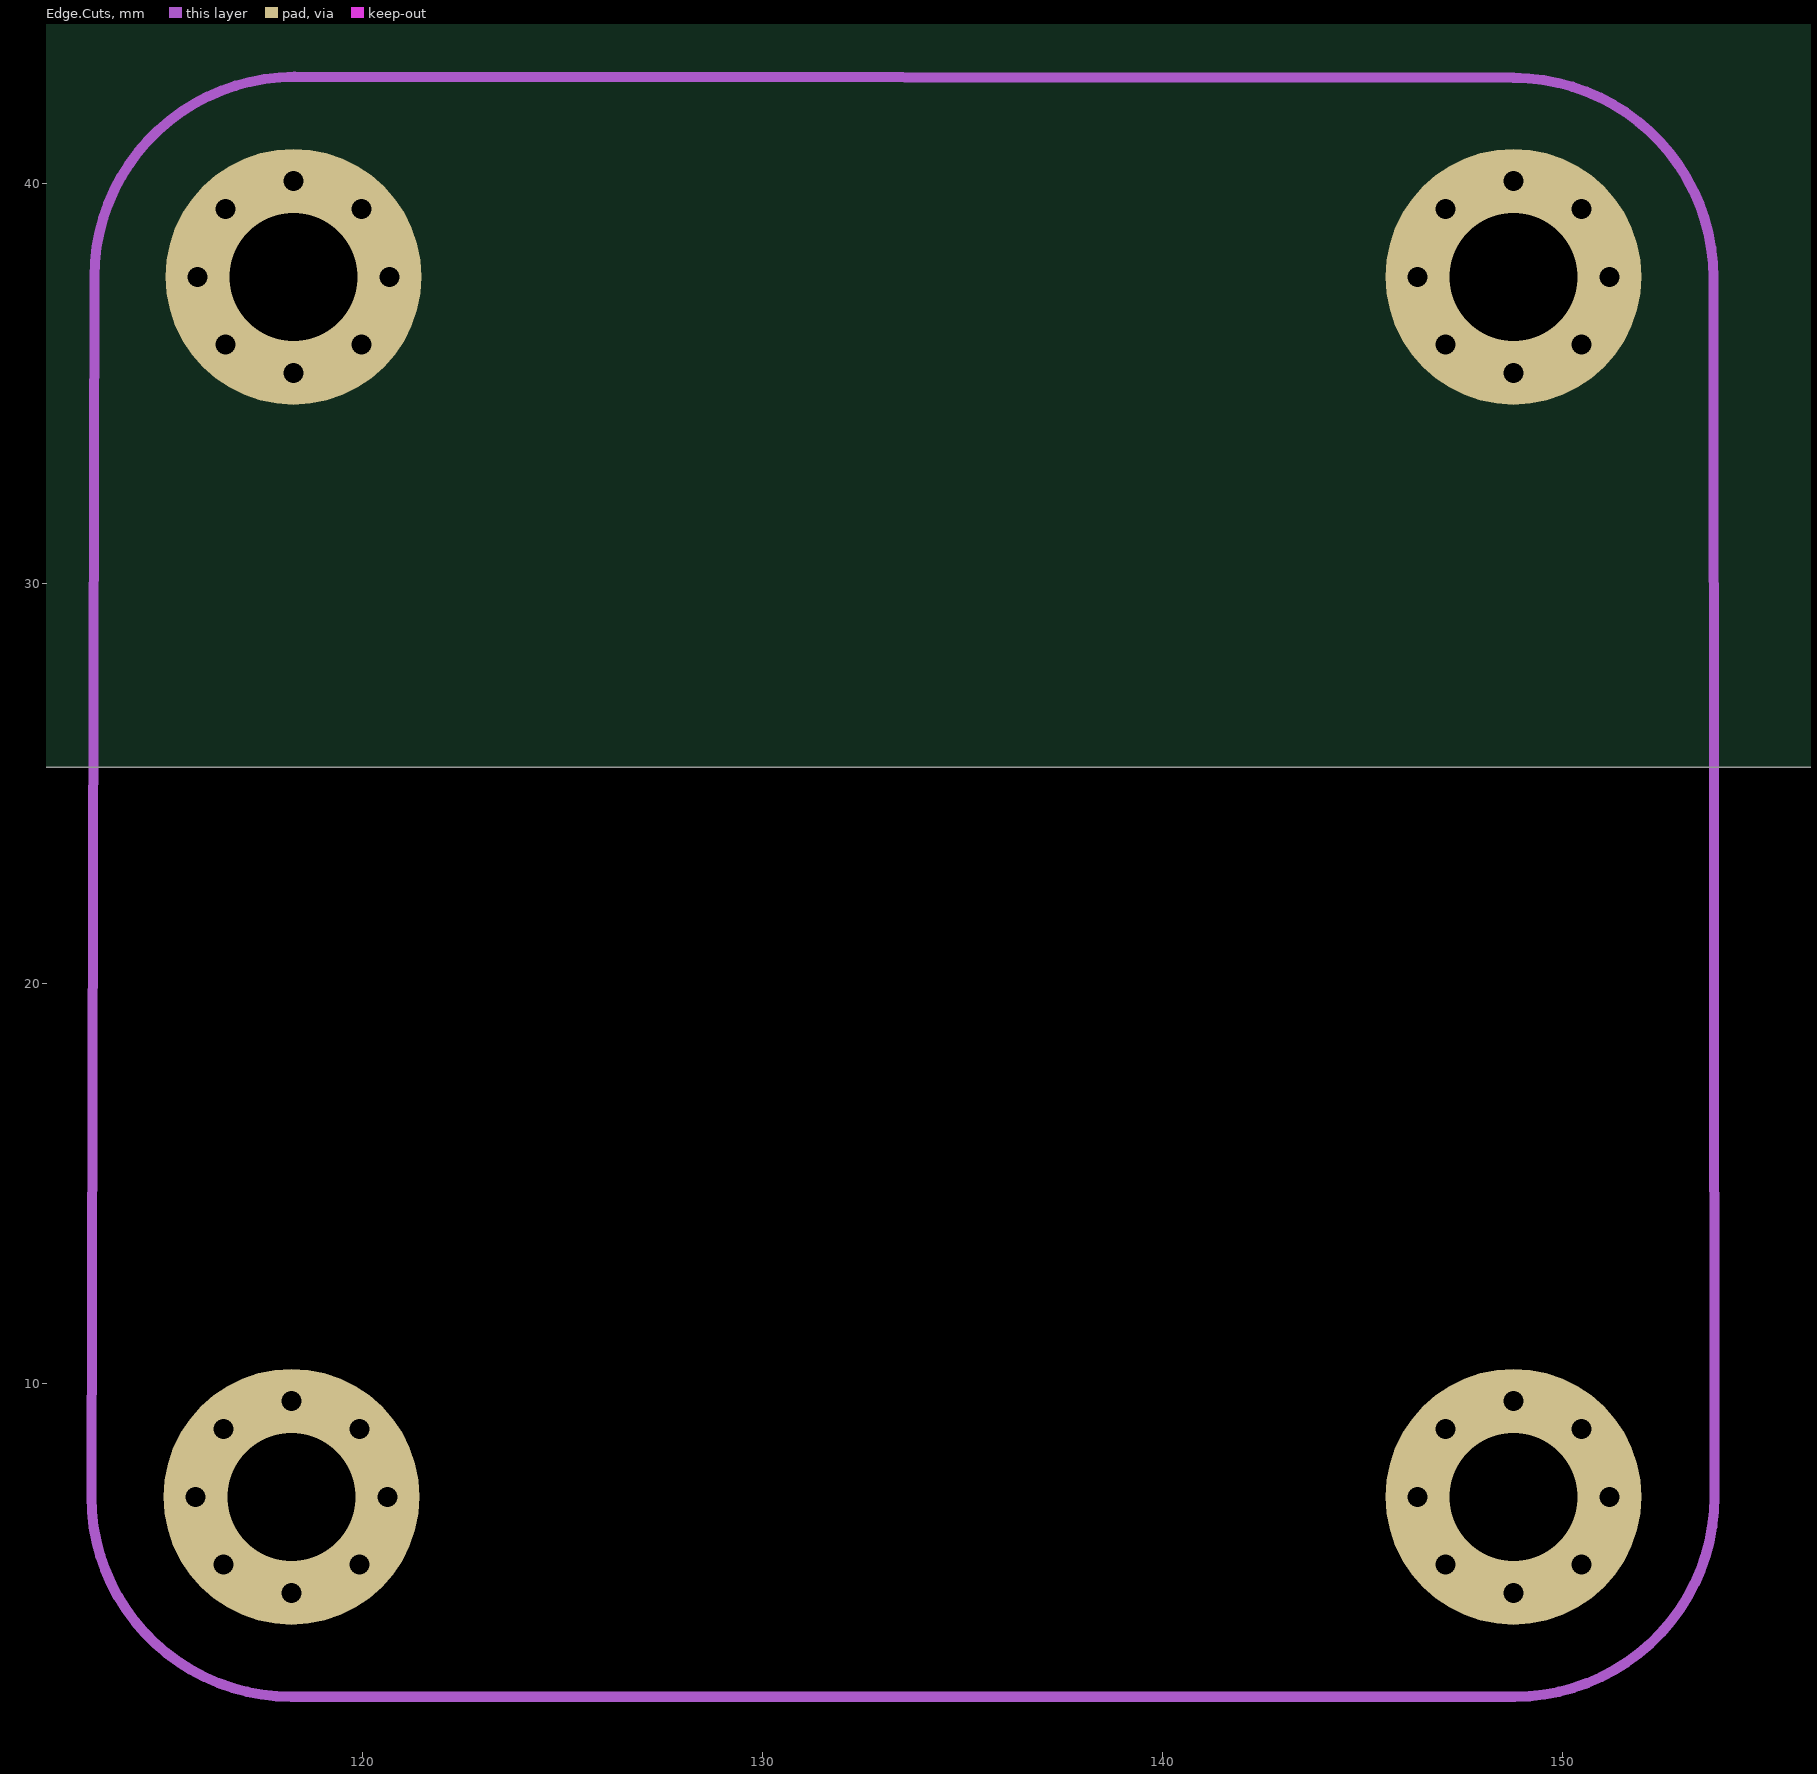
[diagram p11: Edge.Cuts]
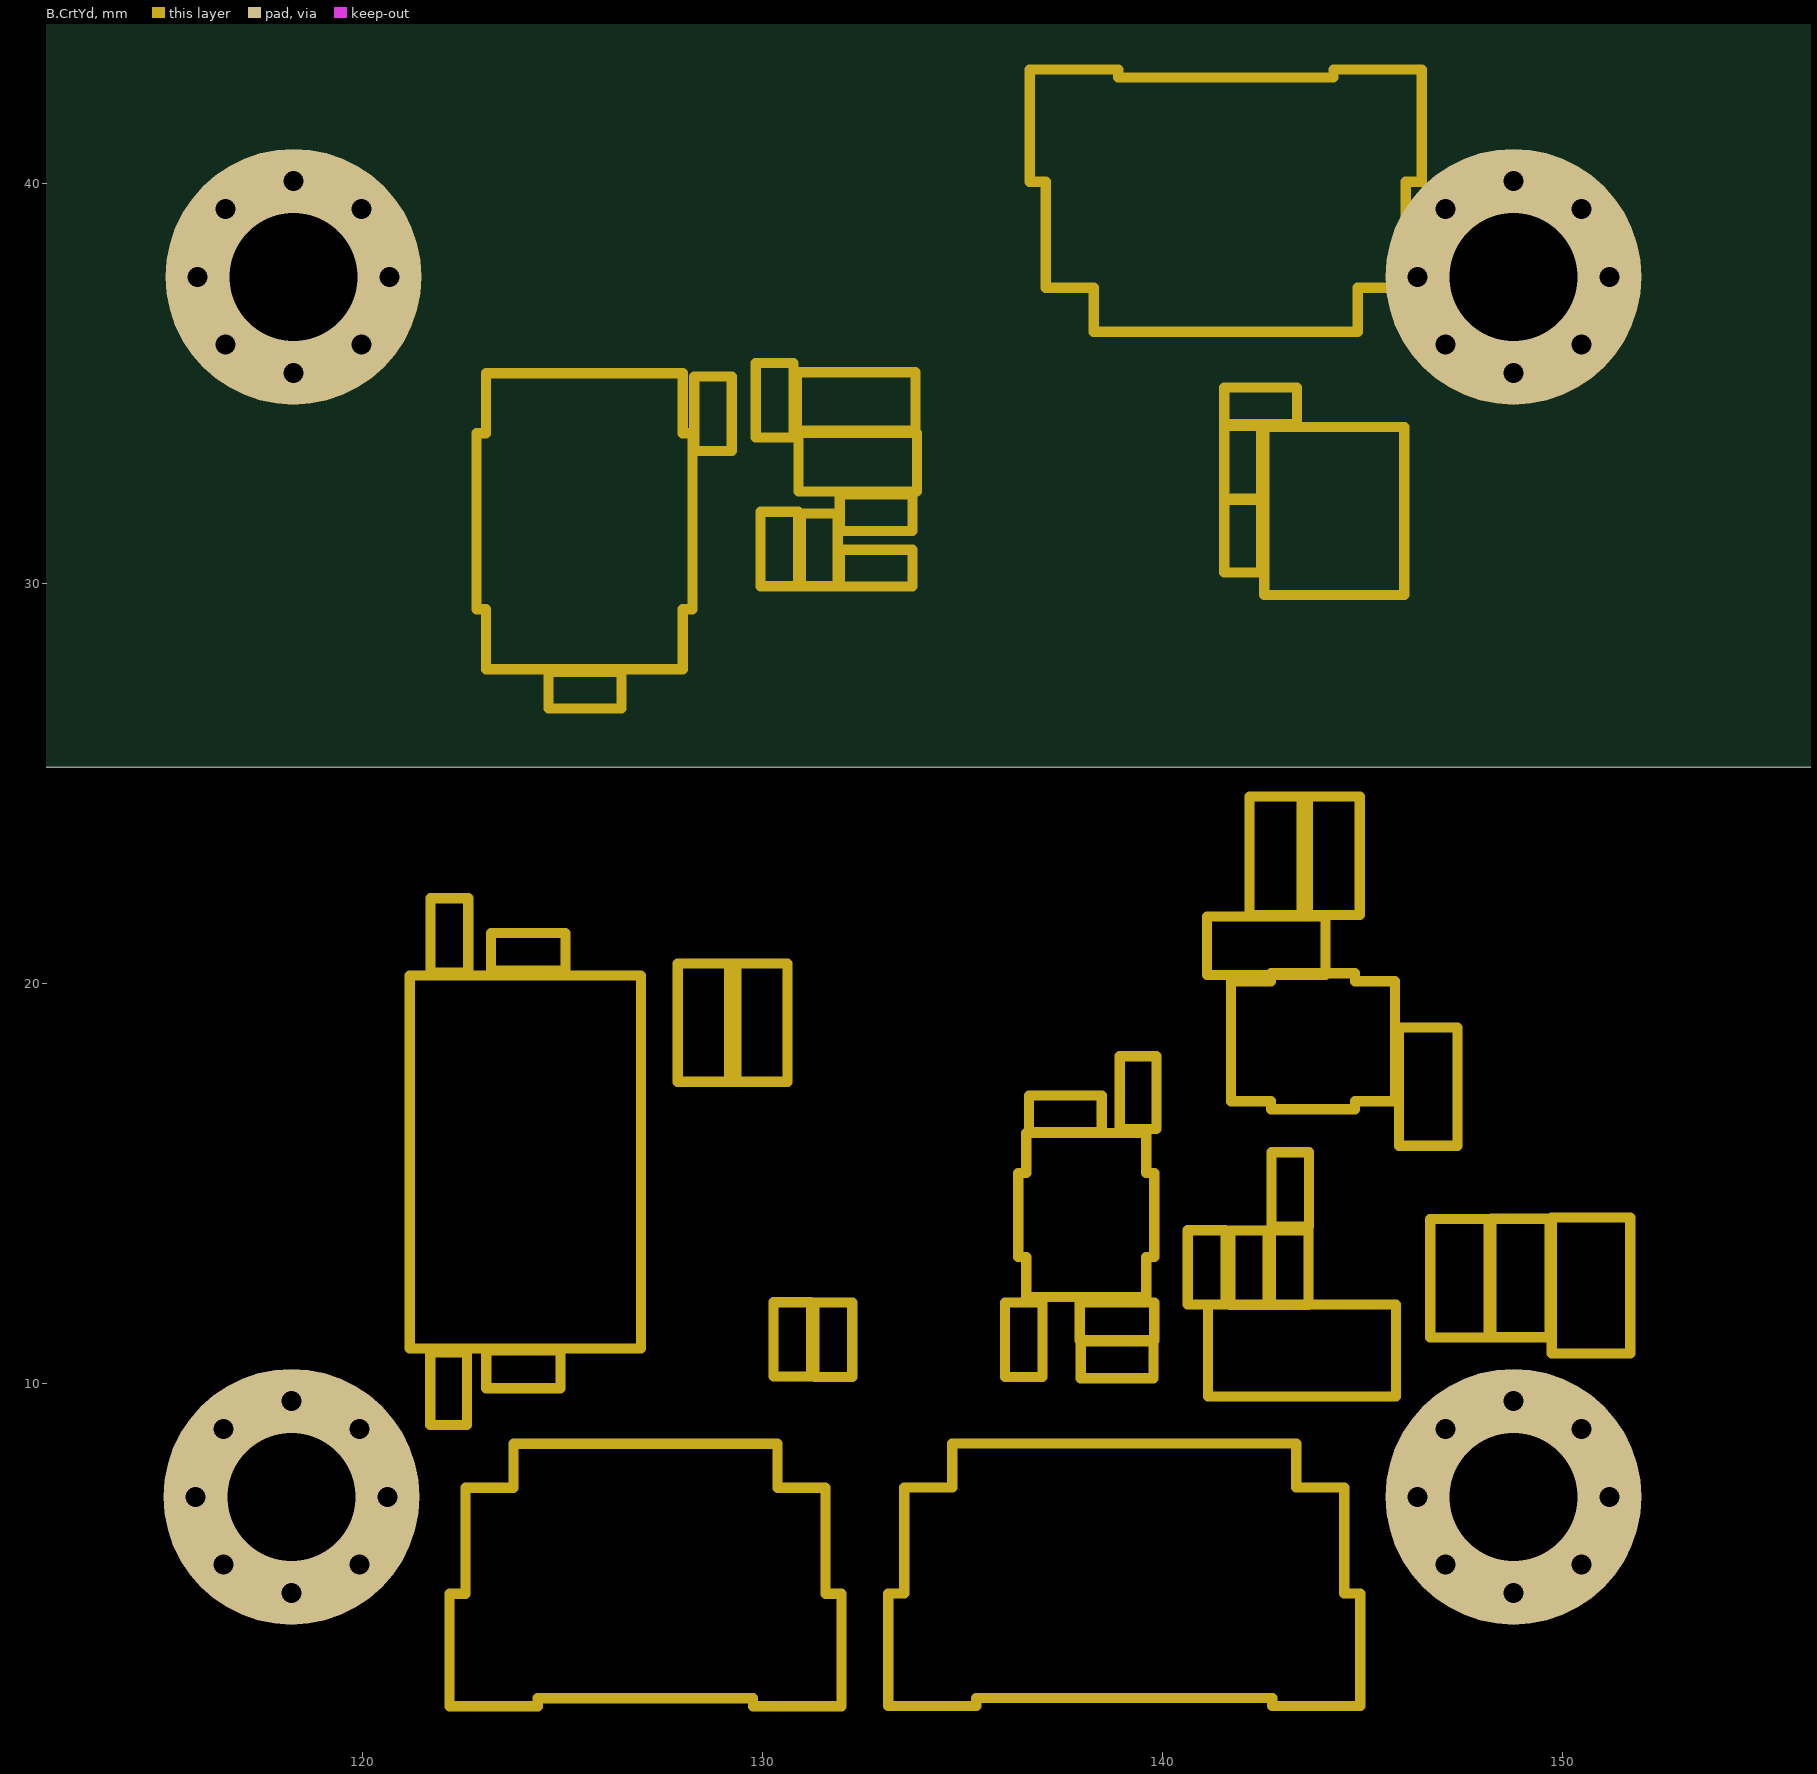
[diagram p12: B.CrtYd]

## Layer stack, top to bottom
Top Solder: solder mask 0.0102, Solder Resist, Dk 3.5
F.Cu: signal copper 0.0356
Dielectric 1: dielectric 0.32, FR-4, Dk 4.8
F.Mask: signal copper 0.0356
Dielectric2: dielectric 0.32, FR-4, Dk 4.8
B.Cu: signal copper 0.0356
Dielectric3: dielectric 0.32, FR-4, Dk 4.8
B.Mask: signal copper 0.0356
Dielectric4: dielectric 0.32, FR-4, Dk 4.8
In1.Cu: signal copper 0.0356
Dielectric5: dielectric 0.32, FR-4, Dk 4.8
F.SilkS: signal copper 0.0356
Dielectric6: dielectric 0.32, FR-4, Dk 4.8
In2.Cu: signal copper 0.0356
Dielectric7: dielectric 0.32, FR-4, Dk 4.8
B.SilkS: signal copper 0.0356
Dielectric8: dielectric 0.32, FR-4, Dk 4.8
In3.Cu: signal copper 0.0356
Dielectric9: dielectric 0.32, FR-4, Dk 4.8
F.Adhes: signal copper 0.0356
Dielectric10: dielectric 0.32, FR-4, Dk 4.8
In4.Cu: signal copper 0.0356
Dielectric11: dielectric 0.32, FR-4, Dk 4.8
B.Adhes: signal copper 0.0356
Dielectric12: dielectric 0.32, FR-4, Dk 4.8
F.Paste: signal copper 0.0356
Dielectric13: dielectric 0.32, FR-4, Dk 4.8
B.Paste: signal copper 0.0356
Dielectric14: dielectric 0.32, FR-4, Dk 4.8
Dwgs.User: signal copper 0.0356
Dielectric15: dielectric 0.32, FR-4, Dk 4.8
Cmts.User: signal copper 0.0356
Dielectric16: dielectric 0.32, FR-4, Dk 4.8
Eco1.User: signal copper 0.0356
Dielectric17: dielectric 0.32, FR-4, Dk 4.8
Eco2.User: signal copper 0.0356
Dielectric18: dielectric 0.32, FR-4, Dk 4.8
Edge.Cuts: signal copper 0.0356
Dielectric19: dielectric 0.32, FR-4, Dk 4.8
Margin: signal copper 0.0356
Dielectric20: dielectric 0.32, FR-4, Dk 4.8
B.CrtYd: signal copper 0.0356
Dielectric21: dielectric 0.32, FR-4, Dk 4.8
F.CrtYd: signal copper 0.0356
Bottom Solder: solder mask 0.0102, Solder Resist, Dk 3.5

## Board outline
25.4,25.4 177.8,25.4 177.8,127 25.4,127

## Design rules (kind name [scope] priority, off if disabled: settings)
Clearance "Clearence 0.2_Polygon" [InNamedPolygon('F.Cu-') OR InNamedPolygon('B.Cu-') OR InNamedPolygon('B.Cu--1') OR InNamedPolygon('In1.Cu-') OR InNamedPolygon('In2.Cu-') OR InNamedPolygon('In3.Cu-') OR InNamedPolygon('In4.Cu-') OR InNamedPolygon('In2.Cu--1') OR InNamedPolygon('In2.Cu--2')] p1: gap=0.2 ignorepadtopadclearanceinfootprint=FALSE
Clearance "Clearence 0.1_NetClass" [InNetClass('Default')] p2: gap=0.1 ignorepadtopadclearanceinfootprint=FALSE
MinimumSolderMaskSliver [All] p1: minsoldermaskwidth=0
PolygonConnect Polygon_In2.Cu--2_ConnectDirect [IsNamedPolygon('In2.Cu--2')] p1: connectstyle=Direct reliefconductorwidth=0.254 reliefentries=4 polygonreliefangle="90 Angle" airgapwidth=0.254
PolygonConnect Polygon_In2.Cu--1_ConnectDirect [IsNamedPolygon('In2.Cu--1')] p2: connectstyle=Direct reliefconductorwidth=0.254 reliefentries=4 polygonreliefangle="90 Angle" airgapwidth=0.254
PolygonConnect Polygon_In4.Cu-_ConnectDirect [IsNamedPolygon('In4.Cu-')] p3: connectstyle=Direct reliefconductorwidth=0.254 reliefentries=4 polygonreliefangle="90 Angle" airgapwidth=0.254
PolygonConnect Polygon_In3.Cu-_ConnectDirect [IsNamedPolygon('In3.Cu-')] p4: connectstyle=Direct reliefconductorwidth=0.254 reliefentries=4 polygonreliefangle="90 Angle" airgapwidth=0.254
PolygonConnect Polygon_In2.Cu-_ConnectDirect [IsNamedPolygon('In2.Cu-')] p5: connectstyle=Direct reliefconductorwidth=0.254 reliefentries=4 polygonreliefangle="90 Angle" airgapwidth=0.254
PolygonConnect Polygon_In1.Cu-_ConnectDirect [IsNamedPolygon('In1.Cu-')] p6: connectstyle=Direct reliefconductorwidth=0.254 reliefentries=4 polygonreliefangle="90 Angle" airgapwidth=0.254
PolygonConnect Polygon_B.Cu--1_ConnectDirect [IsNamedPolygon('B.Cu--1')] p7: connectstyle=Direct reliefconductorwidth=0.254 reliefentries=4 polygonreliefangle="90 Angle" airgapwidth=0.254
PolygonConnect Polygon_B.Cu-_ConnectDirect [IsNamedPolygon('B.Cu-') vs IsVia] p8: connectstyle=Direct reliefconductorwidth=0.254 reliefentries=4 polygonreliefangle="90 Angle" airgapwidth=0.254
PolygonConnect Polygon_B.Cu-_ConnectRelief45 [IsNamedPolygon('B.Cu-') vs (IsThruPin or IsSMTPin) and (PadShape_AllLayers = 'Round')] p9: connectstyle=Relief reliefconductorwidth=0.3 reliefentries=4 polygonreliefangle="45 Angle" airgapwidth=0.2
PolygonConnect Polygon_B.Cu-_ConnectRelief90 [IsNamedPolygon('B.Cu-') vs (IsThruPin or IsSMTPin) and (PadShape_AllLayers <> 'Round')] p10: connectstyle=Relief reliefconductorwidth=0.3 reliefentries=4 polygonreliefangle="90 Angle" airgapwidth=0.2
PolygonConnect Polygon_F.Cu-_ConnectDirect [IsNamedPolygon('F.Cu-') vs IsVia] p11: connectstyle=Direct reliefconductorwidth=0.254 reliefentries=4 polygonreliefangle="90 Angle" airgapwidth=0.254
PolygonConnect Polygon_F.Cu-_ConnectRelief45 [IsNamedPolygon('F.Cu-') vs (IsThruPin or IsSMTPin) and (PadShape_AllLayers = 'Round')] p12: connectstyle=Relief reliefconductorwidth=0.3 reliefentries=4 polygonreliefangle="45 Angle" airgapwidth=0.2
PolygonConnect Polygon_F.Cu-_ConnectRelief90 [IsNamedPolygon('F.Cu-') vs (IsThruPin or IsSMTPin) and (PadShape_AllLayers <> 'Round')] p13: connectstyle=Relief reliefconductorwidth=0.3 reliefentries=4 polygonreliefangle="90 Angle" airgapwidth=0.2
RoutingVias [All] p1: holewidth=0.711 width=1.27 viastyle="Through Hole" minholewidth=0.711 minwidth=1.27 maxholewidth=0.711 maxwidth=1.27
SilkToSilkClearance [All] p1: silktosilkclearance=0
SilkToSolderMaskClearance [IsPad] p1: minsilkscreentomaskgap=0 clearancetoexposedcopper=TRUE
SolderMaskExpansion [All] p1: expansion=0 istentingtop=FALSE
Width [All] p1: maxlimit=10 minlimit=0.254 preferedwidth=0.254 toplayer_prefwidth=0.2 midlayer1_prefwidth=0.2 midlayer2_prefwidth=0.2 midlayer3_prefwidth=0.2 midlayer4_maxwidth=0.254 midlayer5_prefwidth=0.2 midlayer6_prefwidth=0.2 midlayer7_prefwidth=0.2 midlayer8_prefwidth=0.2 midlayer9_prefwidth=0.2 midlayer10_maxwidth=0.254 midlayer11_maxwidth=0.254 midlayer13_maxwidth=0.254 midlayer15_maxwidth=0.254 midlayer17_maxwidth=0.254 midlayer19_prefwidth=0.2 midlayer21_maxwidth=0.254 midlayer23_maxwidth=0.254 midlayer25_prefwidth=0.2 midlayer27_maxwidth=0.254 midlayer29_prefwidth=0.2 bottomlayer_prefwidth=0.2 minimp=50.000000 maximp=50.000000 favimp=50.000000
27 further rules are at their usual default settings.

## Components (designator, comment, footprint, x,y, rotation, side; value= is the part's Value field where it differs from the comment)
C1 "Comment" C_0603_1608Metric#1 148.95,12.625 r270 top value=10uF
C2 "Comment" C_0402_1005Metric#1 139.39,17.26 r90 top value=0.1uF
C3 "Comment" C_0603_1608Metric#1 147.42,12.62 r270 top value=10uF
C4 "Comment" C_0805_2012Metric 150.71,12.435 r270 top value=22uF
C5 "Comment" C_0402_1005Metric#1 137.57,16.73 r0 top value=0.1uF
C6 "Comment" C_0603_1608Metric#1 129.89,19.01 r90 top value=22uF
C7 "Comment" C_0603_1608Metric#1 128.61,19.01 r90 top value=22uF
C8 "Comment" C_0402_1005Metric#1 138.865,10.58 r180 top value=75pF
C9 "Comment" C_0402_1005Metric#2 145.63,24.74 r180 top value=4.7uF
C10 "Comment" C_0603_1608Metric#1 146.64,17.41 r90 top value=10uF
C14 "Comment" C_0603_1608Metric#1 142.59,20.93 r0 top value=0.1uF
C15 "Comment" C_0603_1608Metric#1 142.9,23.18 r90 top value=22uF
C16 "Comment" C_0603_1608Metric#1 144.2,23.18 r90 top value=22uF
C17 "Comment" C_0603_1608Metric#2 143.288,10.952 r180 top value=1uF
C18 "Comment" C_0603_1608Metric#2 143.41,36.46 r90 top value=1uF
C19 "Comment" C_0603_1608Metric#2 139.838,13.582 r90 top value=4,7uF
C20 "Comment" C_0603_1608Metric#2 138.18,36.73 r90 top value=1uF
C21 "Comment" C_0603_1608Metric#2 119.74,26.485 r0 top value=10nF
C22 "Comment" C_0603_1608Metric#2 122.99,31.195 r90 top value=4.7uF
C23 "Comment" C_0603_1608Metric#2 120.21,19.59 r0 top value=1uF
C24 "Comment" C_0402_1005Metric#2 139.3,29.69 r90 top value=0.1uF
C25 "Comment" C_0402_1005Metric#2 124.19,30.645 r90 top value=0.1uF
C26 "Comment" C_0402_1005Metric#2 122.27,25.625 r270 top value=0.1uF
C27 "Comment" C_0603_1608Metric#2 120.215,16.58 r180 top value=1uF
C28 "Comment" C_0402_1005Metric#2 122.27,23.805 r90 top value=0.1uF
C29 "Comment" C_0402_1005Metric#2 120.79,20.92 r0 top value=0.1uF
C30 "Comment" C_0402_1005Metric#2 122.28,17.85 r270 top value=10nF
C31 "Comment" C_0402_1005Metric#2 138.42,14.175 r270 top value=0.1uF
C32 "Comment" C_0402_1005Metric#2 125.98,12.675 r270 top value=0.1uF
C33 "Comment" C_0603_1608Metric#2 120.21,15.055 r180 top value=0.1uF
C34 "Comment" C_0603_1608Metric#2 137.02,12.14 r90 top value=2.2uF
C35 "Comment" C_0603_1608Metric#2 141.16,27.96 r270 top value=2.2uF
C36 "Comment" C_0402_1005Metric#2 129.117,35.96 r90 top value=0.1uF
C37 "Comment" C_0402_1005Metric#1 122.15,9.86 r270 top value=0.1uF
C38 "Comment" C_0603_1608Metric#2 131.237,36.48 r90 top value=2.2uF
C39 "Comment" C_0402_1005Metric#2 130.04,35.96 r90 top value=10nF
C43 "Comment" C_0402_1005Metric#2 136.71,34.6 r90 top value=0.1uF
C44 "Comment" C_0402_1005Metric#2 136.01,36.03 r0 top value=0.1uF
C45 "Comment" C_0402_1005Metric#1 142,33.02 r90 top value=30pF
C46 "Comment" C_0402_1005Metric#2 129.61,12.56 r180 top value=0.1uF
C47 "Comment" C_0402_1005Metric#1 142,31.17 r270 top value=30pF
C48 "Comment" C_0603_1608Metric#1 132.34,34.54 r180 top value=22uF
C49 "Comment" C_0603_1608Metric#1 132.38,33.02 r180 top value=22uF
C50 "Comment" C_0402_1005Metric#2 133.42,11.93 r90 top value=0.1uF
C51 "Comment" C_0402_1005Metric#1 131.42,30.83 r90 top value=0.1uF
C52 "Comment" C_0402_1005Metric#1 132.84,31.76 r180 top value=0.1uF
C53 "Comment" C_0402_1005Metric#1 142.45,34.43 r0 top value=0.1uF
C54 "Comment" C_0402_1005Metric#1 132.84,30.37 r180 top value=0.1uF
C55 "Comment" C_0402_1005Metric#1 125.56,27.32 r0 top value=0.1uF
D1 "Comment" D_SMF 143.488,10.81 r180 top value=SMF26A
D2 "Comment" (zener)SOD-123F_L2.8-W1.8-LS3.7-RD 149.11,15.25 r0 top value=BZT52C12-13-F
D3 "Comment" D_SOD-123F 144.31,16.99 r0 top value=PMEG2010EH
D4 "Comment" LED_0805_2012Metric 143.62,31.14 r0 top value=LED
D5 "Comment" LED_0805_2012Metric 143.67,28.09 r0 top value=LED
D6 "Comment" LED_0805_2012Metric 124.01,11.207 r90 top value=LED
D7 "Comment" LED_0805_2012Metric 121.91,11.227 r90 top value=LED
D8 "Comment" SOT-23 125.53,36.317 r90 top value=SM712_SOT23
FB1 "Comment" L_0603_1608Metric 120.21,18.04 r0 top value=1k@100Mhz
G*** "Comment" LOGO#1 127.205,23.59 r180 top value=LOGO
G*** "Comment" LOGO#2 142.02,7.819 r90 top value=LOGO
G*** "Comment" LOGO#3 119.412,31.021 r90 top value=LOGO
H1 "Comment" MountingHole_3.2mm_M3_Pad_Via 118.27,37.655 r0 top value=MountingHole
H2 "Comment" MountingHole_3.2mm_M3_Pad_Via 148.77,37.655 r0 top value=MountingHole
H3 "Comment" MountingHole_3.2mm_M3_Pad_Via 148.77,7.155 r0 top value=MountingHole
H4 "Comment" MountingHole_3.2mm_M3_Pad_Via 118.22,7.155 r0 top value=MountingHole
J1 "Comment" GCT_USB4110GFA 148.52,21.02 r90 top value=USB4110GFA
J2 "Comment" CONN-SMD_4P-P1.00_SM04B-SRSS-TB-LF-SN 133,39.547 r0 top value=FPV
J3 "Comment" CONN-SMD_4P-P1.00_SM04B-SRSS-TB-LF-SN 116.53,30.51 r90 top value=ST_LINK
J4 "Comment" JST_SH_SM06B-SRSS-TB_1x06-1MP_P1.00mm_Horizontal#1 141.58,39.56 r0 top value=GPS
J5 "Comment" CONN-SMD_4P-P1.00_SM04B-SRSS-TB-LF-SN 116.54,15.42 r90 top value="Airspeed sensor"
J6 "Comment" JST_SH_SM08B-SRSS-TB_1x08-1MP_P1.00mm_Horizontal 139.04,5.205 r180 top value="4in1 ESC"
J7 "Comment" CONN-SMD_4P-P1.00_SM04B-SRSS-TB-LF-SN 150.502,27.998 r270 top value="RC Receiver"
J8 "Comment" CONN-SMD_4P-P1.00_SM04B-SRSS-TB-LF-SN 116.53,23.22 r90 top value=VTX
J9 "Comment" JST_SH_SM06B-SRSS-TB_1x06-1MP_P1.00mm_Horizontal#2 127.07,5.2 r180 top value=DJI
J10 "Comment" CONN-SMD_4P-P1.00_SM04B-SRSS-TB-LF-SN 125.59,39.547 r0 top value="CAN BUS"
J11 "Comment" CONN-SMD_4P-P1.00_SM04B-SRSS-TB-LF-SN 150.527,20.81 r270 top value="CAN BUS"
JP1 "Comment" SolderJumper-3_P1.3mm_Open_RoundedPad1.0x1.5mm_NumberLabels 134.14,11.08 r0 top value=9V/12V
L1 "Comment" IND-SMD_L5.4-W5.2 133.66,18.75 r0 top value=15uH
L2 "Comment" IND-SMD_L4.4-W4.2 139.36,22.07 r270 top value=4.7uH
Q1 "Comment" AO3407A 145.28,14.04 r90 top value=AO3407A
R1 "Comment" R_0402_1005Metric#1 145.63,19.26 r0 top value=5.1k
R2 "Comment" R_0402_1005Metric#1 145.64,23.7 r0 top value=5.1k
R3 "Comment" R_0402_1005Metric#2 143.19,14.84 r90 top value=100k
R4 "Comment" R_0402_1005Metric#2 130.74,11.09 r270 top value=49.9
R5 "Comment" R_0402_1005Metric#2 138.86,11.54 r180 top value=100k
R5B1 "Comment" R_0402_1005Metric#2 136.53,11.08 r90 top value=7.15K
R5C1 "Comment" R_0402_1005Metric#2 131.77,11.08 r90 top value=5.23k
R6 "Comment" R_0402_1005Metric#2 142.16,12.88 r90 top value=4.42k
R7 "Comment" R_0402_1005Metric#2 143.18,12.88 r270 top value=20k
R8 "Comment" R_0402_1005Metric#2 141.1,12.89 r270 top value=0
R13 "Comment" R_0402_1005Metric#1 145.86,31.16 r90 top value=330
R14 "Comment" R_0402_1005Metric#1 145.87,29.04 r90 top value=330
R15 "Comment" R_0402_1005Metric#1 144.24,33.43 r0 top value=10k
R16 "Comment" R_0402_1005Metric#1 150.33,28.07 r180 top value=10k
R17 "Comment" R_0402_1005Metric#1 124,13.402 r180 top value=330
R18 "Comment" R_0402_1005Metric#1 121.89,13.412 r0 top value=330
R19 "Comment" R_0402_1005Metric#1 128.04,33.21 r90 top value=0
R20 "Comment" R_0402_1005Metric#2 124.14,20.78 r180 top value=10k
R21 "Comment" R_0402_1005Metric#2 124.02,10.34 r0 top value=10k
R22 "Comment" R_0402_1005Metric#2 122.17,21.19 r90 top value=10k
R23 "Comment" R_0402_1005Metric#1 119.65,13.79 r180 top value=4.7k
R24 "Comment" R_0402_1005Metric#1 119.64,12.78 r180 top value=4.7k
R25 "Comment" R_0402_1005Metric#2 130.42,30.85 r270 top value=75
R26 "Comment" R_0402_1005Metric#2 130.3,34.57 r90 top value=75
R27 "Comment" R_0402_1005Metric#2 128.76,34.23 r90 top value=0
R28 "Comment" R_0402_1005Metric#1 125.52,32.6 r180 top value=120
R29 "Comment" R_0402_1005Metric#1 135.79,12.23 r270 top value=7.5k
R30 "Comment" R_0402_1005Metric#1 134.84,12.24 r270 top value=7.5k
R31 "Comment" R_0402_1005Metric#1 141.15,33.43 r90 top value=4.7k
R32 "Comment" R_0402_1005Metric#1 140.08,33.43 r90 top value=4.7k
SW1 "Comment" SW_Push_SPST_NO_Alps_SKRK 151.85,31.37 r270 top value=reset
SW2 "Comment" SW_Push_SPST_NO_Alps_SKRK 148.37,31.36 r90 top value=MCU_BOOT
TP1 "Comment" Solderpad 132.62,6.16 r180 top value=power
TP2 "Comment" Solderpad 144.75,5.515 r0 top value="Motor 1"
TP3 "Comment" Solderpad 142.75,5.5 r0 top value=GND
TP4 "Comment" Solderpad 140.47,38.68 r180 top value=power
TP5 "Comment" Solderpad 122.75,5.5 r0 top value="Motor 2"
TP6 "Comment" Solderpad 114.75,23.27 r90 top value=power
TP7 "Comment" Solderpad 116.78,13.24 r270 top value=GND
TP8 "Comment" Solderpad 122.5,40.83 r0 top value=M3
TP9 "Comment" Solderpad 124.75,5.5 r0 top value=GND
TP10 "Comment" Solderpad 124.45,40.785 r0 top value=power
TP12 "Comment" Solderpad 142.47,40.67 r0 top value=power
TP13 "Comment" Solderpad 136.75,5.5 r0 top value=servos
TP14 "Comment" "BAT pad" 147.99,11.59 r90 top value=power
TP15 "Comment" Solderpad 144.52,40.675 r0 top value=M4
TP16 "Comment" Solderpad 134.775,5.5 r0 top value=servos
TP17 "Comment" Solderpad 116.725,29.28 r270 top value=power
TP18 "Comment" Solderpad 114.75,21.24 r90 top value=power
TP20 "Comment" Solderpad 132.775,5.5 r0 top value=servos
TP21 "Comment" Solderpad 128.62,6.16 r180 top value=power
TP22 "Comment" Solderpad 114.75,15.24 r90 top value=power
TP23 "Comment" "BAT pad" 147.99,13.53 r90 top value=power
TP24 "Comment" Solderpad 130.775,5.5 r0 top value=servos
TP25 "Comment" Solderpad 130.48,40.72 r0 top value=power
TP26 "Comment" Solderpad 114.72,31.35 r90 top value=power
TP27 "Comment" Solderpad 138.72,8.115 r0 top value=power
TP28 "Comment" Solderpad 128.49,40.72 r0 top value=sensors
TP29 "Comment" Solderpad 126.775,5.525 r0 top value=TELEMETRY_RX
TP30 "Comment" Solderpad 128.775,5.5 r0 top value=TELEMETRY_TX
TP31 "Comment" Solderpad 136.65,6.13 r180 top value=5V
TP32 "Comment" Solderpad 126.52,38.74 r180 top value=GND
TP33 "Comment" Solderpad 114.74,27.29 r90 top value=sensors
TP34 "Comment" Solderpad 114.75,25.29 r90 top value=sensors
TP35 "Comment" Solderpad 132.48,40.695 r0 top value=sensors
TP36 "Comment" Solderpad 134.51,40.71 r0 top value=sensors
TP37 "Comment" Solderpad 138.5,40.7 r0 top value=sensors
TP38 "Comment" Solderpad 136.5,40.7 r0 top value=sensors
TP39 "Comment" Solderpad 138.75,5.525 r0 top value=sensors
TP40 "Comment" Solderpad 140.75,5.5 r0 top value=sensors
TP41 "Comment" Solderpad 114.665,17.34 r90 top value=sensors
TP42 "Comment" Solderpad 114.75,19.24 r90 top value=sensors
TP43 "Comment" Solderpad 134.62,8.155 r0 top value=power
TP45 "Comment" Solderpad 130.64,8.165 r0 top value=power
U1 "Comment" SOT-23-6#1 138.09,14.2 r270 top value=TPS54302
U2 "Comment" SOT-23-6#2 143.64,21.54 r180 top value=USBLC6-2SC6
U4 "Comment" TSOT-23-6 143.76,18.542 r180 top value=AP63205WU
U5 "Comment" SOT-23-5 142.707,13.57 r180 top value=AP2112K-3.3
U6 "Comment" "(AP7343 )SOT-25_L3.0-W1.6-P0.95-LS2.8-BL" 140.8,36.54 r90 top value=AP7343-33W5-7
U7 "Comment" LQFP-100_14x14mm_P0.5mm 131.48,22.37 r0 top value=STM32H743VITx
U8 "Comment" PQFN50P300X250X97-14N 130.305,33.46 r180 top value=ICM-42688-P
U9 "Comment" W25Q128JVSIQ 124.07,15.525 r270 top value=W25Q128JVSIQ
U10 "Comment" XDCR_BMI270 134.82,33.76 r90 top value=BMI270
U12 "Comment" PQFN50P200X200X80-10N 131.73,12.23 r180 top value=BMP388
U13 "Comment" AT7456E 137.64,30.737 r270 top value=AT7456E
U14 "Comment" SOIC-8_3.9x4.9mm_P1.27mm 125.545,31.545 r90 top value=SN65HVD230
Y1 "Comment" Oscillator_SMD_Abracon_ASE-4Pin_3.2x2.5mm 119.73,23.62 r270 top value=ASE-8.000MHZ-LC-T
Y2 "Comment" Crystal_SMD_3225-4Pin_3.2x2.5mm 144.29,31.8 r270 top value="27Mhz 20pF"

## Footprints (in the part's own frame and the unit in brackets; to place one, negate y for a bottom-side part, rotate by r counter-clockwise, add the part's x,y. Pads: shape width x height; smd on the part's side, far side on the other; paste and mask are expansions set on the pad)
"(AP7343 )SOT-25_L3.0-W1.6-P0.95-LS2.8-BL" [mm]
  rect 0.5x0.9 smd paste-0.9 mask-0.9: 1(-0.95,-1.3) 2(0,-1.3) 3(0.95,-1.3) 4(0.95,1.3) 5(-0.95,1.3)
  F.SilkS circle w0.254: c-1.65,-1.27 r0.13
  Cmts.User circle w0.254: c-1.08,-1.59 r0.1
(zener)SOD-123F_L2.8-W1.8-LS3.7-RD [mm]
  rect 1x1.2 on Mid2 paste-1.2 mask-1.2: 1(-1.65,0) 2(1.65,0)
  B.SilkS lines w0.254: -0.76,0 0.76,0 ; -0.51,-0.5 -0.51,0.51 ; -0.51,0 0.51,-0.4 0.51,0.41 -0.51,0
AO3407A [mm]
  rect 1.07x0.6 on Mid2 paste-1.07 mask-1.07: 1(1.24,0.95) 2(1.24,-0.95) 3(-1.24,0)
  Cmts.User circle w0.254: c1.65,0.95 r0.1
AT7456E [mm]
  rrect100% 0.34x1.73 on Mid2 paste-1.73 mask-1.73: 1(-4.23,2.87) 2(-3.58,2.87) 3(-2.93,2.87) 4(-2.28,2.87) 5(-1.63,2.87) 6(-0.98,2.87) 7(-0.32,2.87) 8(0.33,2.87) 9(0.98,2.87) 10(1.63,2.87) 11(2.28,2.87) 12(2.93,2.87) 13(3.58,2.87) 14(4.23,2.87) 15(4.23,-2.87) 16(3.58,-2.87) 17(2.93,-2.87) 18(2.28,-2.87) 19(1.63,-2.87) 20(0.98,-2.87) 21(0.33,-2.87) 22(-0.32,-2.87) 23(-0.98,-2.87) 24(-1.63,-2.87) 25(-2.28,-2.87) 26(-2.93,-2.87) 27(-3.58,-2.87) 28(-4.23,-2.87)
  rect 6.7x2.9 on Mid2 paste-6.7 mask-6.7: 29(0,0)
  B.SilkS circle w0.254: c-4.23,1.02 r0.15
  Cmts.User circle w0.254: c-4.23,3.6 r0.15
"BAT pad" [mm]
  rrect25% 1.4x2.3 smd paste-2.3 mask-2.3: 1(0,-0.5)
C_0402_1005Metric#1 [mm]
  rrect25% 0.56x0.62 on Mid2 paste-0.62 mask-0.62: 1(-0.48,0) 2(0.48,0)
  B.SilkS lines w0.254: -0.108,0.36 0.108,0.36 ; -0.108,-0.36 0.108,-0.36
  B.CrtYd lines w0.254: -0.91,0.46 -0.91,-0.46 0.91,-0.46 0.91,0.46 -0.91,0.46
C_0402_1005Metric#2 [mm]
  rrect25% 0.56x0.62 smd paste-0.62 mask-0.62: 1(-0.48,0) 2(0.48,0)
  F.SilkS lines w0.254: 0.108,0.36 -0.108,0.36 ; 0.108,-0.36 -0.108,-0.36
  F.CrtYd lines w0.254: 0.91,0.46 -0.91,0.46 -0.91,-0.46 0.91,-0.46 0.91,0.46
C_0603_1608Metric#1 [mm]
  rrect25% 0.9x0.95 on Mid2 paste-0.95 mask-0.95: 1(-0.775,0) 2(0.775,0)
  B.SilkS lines w0.254: 0.141,-0.51 -0.141,-0.51 ; 0.141,0.51 -0.141,0.51
  B.CrtYd lines w0.254: 1.48,-0.73 1.48,0.73 -1.48,0.73 -1.48,-0.73 1.48,-0.73
C_0603_1608Metric#2 [mm]
  rrect25% 0.9x0.95 smd paste-0.95 mask-0.95: 1(-0.775,0) 2(0.775,0)
  F.SilkS lines w0.254: 0.141,0.51 -0.141,0.51 ; 0.141,-0.51 -0.141,-0.51
  F.CrtYd lines w0.254: 1.48,0.73 -1.48,0.73 -1.48,-0.73 1.48,-0.73 1.48,0.73
C_0805_2012Metric [mm]
  rrect25% 1x1.45 on Mid2 paste-1.45 mask-1.45: 1(-0.95,0) 2(0.95,0)
  B.SilkS lines w0.254: 0.261,-0.735 -0.261,-0.735 ; 0.261,0.735 -0.261,0.735
  B.CrtYd lines w0.254: 1.7,-0.98 1.7,0.98 -1.7,0.98 -1.7,-0.98 1.7,-0.98
CONN-SMD_4P-P1.00_SM04B-SRSS-TB-LF-SN [mm]
  rect 0.6x1.55 on Mid2 paste-1.55 mask-1.55: 1(-1.5,-1.94) 2(-0.5,-1.94) 3(0.5,-1.94) 4(1.5,-1.94)
  rect 1.2x1.8 on Mid2 paste-1.8 mask-1.8: 5(2.8,1.94) 6(-2.8,1.94)
  Cmts.User circle w0.254: c-1.54,-2.38 r0.15
Crystal_SMD_3225-4Pin_3.2x2.5mm [mm]
  rrect21% 1.4x1.2 on Mid2 paste-1.4 mask-1.4: 1(-1.1,0.85) 2(1.1,0.85) 3(1.1,-0.85) 4(-1.1,-0.85)
  B.CrtYd lines w0.254: 2.1,-1.75 -2.1,-1.75 -2.1,1.75 2.1,1.75 2.1,-1.75
D_SMF [mm]
  rrect19% 1.3x1.4 on Mid2 paste-1.4 mask-1.4: 1(-1.45,0) 2(1.45,0)
  B.CrtYd lines w0.254: 2.35,1.15 -2.35,1.15 -2.35,-1.15 2.35,-1.15 2.35,1.15
D_SOD-123F [mm]
  rrect23% 1.1x1.1 smd paste-1.1 mask-1.1: 1(-1.4,0) 2(1.4,0)
  F.CrtYd lines w0.254: -2.2,-1.15 2.2,-1.15 2.2,1.15 -2.2,1.15 -2.2,-1.15
GCT_USB4110GFA [mm]
  rect 0.6x1.15 smd paste-1.15 mask-1.15: A1/B12(-3.2,1.075) A4/B9(-2.4,1.075) B1/A12(3.2,1.075) B4/A9(2.4,1.075)
  rect 0.3x1.15 smd paste-1.15 mask-1.15: A5(-1.25,1.075) A6(-0.25,1.075) A7(0.25,1.075) A8(1.25,1.075) B5(1.75,1.075) B6(0.75,1.075) B7(-0.75,1.075) B8(-1.75,1.075)
  rect 2.18x2 smd paste-2.18 mask-2.18: S1(-5.11,0.5) S2(5.11,0.5) S3(-5.11,-3.43) S4(5.11,-3.43)
  F.CrtYd lines w0.254: -6.45,1.9 -6.45,-6.53 6.45,-6.53 6.45,1.9 -6.45,1.9
IND-SMD_L4.4-W4.2 [mm]
  rect 1.4x2.12 on Mid2 paste-2.12 mask-2.12: 1(2.03,0) 2(-2.03,0)
  B.SilkS lines w0.254: 2.28,-1.21 2.28,-2.18 -2.28,-2.18 -2.28,-1.21 ; 2.28,1.21 2.28,2.18 -2.28,2.18 -2.28,1.21
IND-SMD_L5.4-W5.2 [mm]
  rect 1.9x2.5 on Mid2 paste-2.5 mask-2.5: 1(2.05,0) 2(-2.05,0)
  B.SilkS lines w0.254: -2.78,-1.42 -2.78,-2.68 2.78,-2.68 2.78,-1.43 ; -2.78,1.42 -2.78,2.68 2.78,2.68 2.78,1.41
JST_SH_SM06B-SRSS-TB_1x06-1MP_P1.00mm_Horizontal#1 [mm]
  rrect25% 0.6x1.55 on Mid2 paste-1.55 mask-1.55: 1(-2.5,-2) 2(-1.5,-2) 3(-0.5,-2) 4(0.5,-2) 5(1.5,-2) 6(2.5,-2)
  rrect21% 1.2x1.8 on Mid2 paste-1.8 mask-1.8: MP(-3.8,1.875) MP(3.8,1.875)
  B.CrtYd lines w0.254: -4.9,0.47 -4.5,0.47 -4.5,-2.18 -3.3,-2.18 -3.3,-3.28 3.3,-3.28 3.3,-2.18 4.5,-2.18 4.5,0.47 4.9,0.47 4.9,3.28 2.69,3.28 2.69,3.08 -2.69,3.08 -2.69,3.28 -4.9,3.28 -4.9,0.47
JST_SH_SM06B-SRSS-TB_1x06-1MP_P1.00mm_Horizontal#2 [mm]
  rrect25% 0.6x1.55 on Mid2 paste-1.55 mask-1.55: 1(-2.5,-2) 2(-1.5,-2) 3(-0.5,-2) 4(0.5,-2) 5(1.5,-2) 6(2.5,-2)
  rrect21% 1.2x1.8 on Mid2 paste-1.8 mask-1.8: MP(-3.8,1.875) MP(3.8,1.875)
  B.SilkS lines w0.254: 4.11,0.715 4.11,-1.785 3.06,-1.785 ; 2.94,2.685 -2.94,2.685 ; -3.06,-2.775 -3.06,-1.785 -4.11,-1.785 -4.11,0.715
  B.CrtYd lines w0.254: 4.9,3.28 2.69,3.28 2.69,3.08 -2.69,3.08 -2.69,3.28 -4.9,3.28 -4.9,0.47 -4.5,0.47 -4.5,-2.18 -3.3,-2.18 -3.3,-3.28 3.3,-3.28 3.3,-2.18 4.5,-2.18 4.5,0.47 4.9,0.47 4.9,3.28
JST_SH_SM08B-SRSS-TB_1x08-1MP_P1.00mm_Horizontal [mm]
  rrect25% 0.6x1.55 on Mid2 paste-1.55 mask-1.55: 1(-3.5,-2) 2(-2.5,-2) 3(-1.5,-2) 4(-0.5,-2) 5(0.5,-2) 6(1.5,-2) 7(2.5,-2) 8(3.5,-2)
  rrect21% 1.2x1.8 on Mid2 paste-1.8 mask-1.8: MP(-4.8,1.875) MP(4.8,1.875)
  B.CrtYd lines w0.254: 5.9,3.28 3.7,3.28 3.7,3.08 -3.7,3.08 -3.7,3.28 -5.9,3.28 -5.9,0.47 -5.5,0.47 -5.5,-2.18 -4.3,-2.18 -4.3,-3.28 4.3,-3.28 4.3,-2.18 5.5,-2.18 5.5,0.47 5.9,0.47 5.9,3.28
L_0603_1608Metric [mm]
  rrect25% 0.875x0.95 smd paste-0.95 mask-0.95: 1(-0.787,0) 2(0.787,0)
  F.SilkS lines w0.254: -0.163,-0.51 0.163,-0.51 ; -0.163,0.51 0.163,0.51
  F.CrtYd lines w0.254: -1.48,-0.73 1.48,-0.73 1.48,0.73 -1.48,0.73 -1.48,-0.73
LED_0805_2012Metric [mm]
  rrect25% 0.975x1.4 smd paste-1.4 mask-1.4: 1(-0.937,0) 2(0.937,0)
  F.CrtYd lines w0.254: -1.68,-0.95 1.68,-0.95 1.68,0.95 -1.68,0.95 -1.68,-0.95
LOGO#1 [mm]
  B.SilkS region: 338 vertices and 6 holes, not listed, extent -4.96,-3.06 4.958,0.272
  B.SilkS region: -2.804,1.762 -2.701,1.661 -2.685,1.55 -2.682,1.533 -2.674,1.48 -2.667,1.437 -2.662,1.412 -2.662,1.412 -2.662,1.399 -2.67,1.388 -2.692,1.377 -2.73,1.363 -2.79,1.344 -2.813,1.337 -2.883,1.318 -2.966,1.297 -3.054,1.276 -3.139,1.257 -3.195,1.245 -3.302,1.221 -3.384,1.201 -3.443,1.185 -3.48,1.172 -3.496,1.162 -3.497,1.159 -3.491,1.139 -3.476,1.11 -3.449,1.068 -2.632,1.068 -2.587,0.987 -2.587,0.986 -2.563,0.942 -2.543,0.905 -2.533,0.882 -2.532,0.88 -2.533,0.875 -2.538,0.871 -2.552,0.867 -2.575,0.865 -2.61,0.863 -2.66,0.861 -2.727,0.86 -2.813,0.86 -2.92,0.86 -3.051,0.86 -3.577,0.86 -3.694,0.935 -3.729,0.957 -3.777,0.989 -3.816,1.014 -3.838,1.03 -3.848,1.039 -3.864,1.067 -3.881,1.113 -3.9,1.182 -3.91,1.223 -3.923,1.273 -3.931,1.309 -3.934,1.326 -3.932,1.328 -3.912,1.338 -3.869,1.351 -3.806,1.369 -3.725,1.389 -3.627,1.413 -3.516,1.438 -3.393,1.465 -3.363,1.472 -3.261,1.495 -3.184,1.514 -3.129,1.53 -3.097,1.543 -3.087,1.552 -3.087,1.553 -3.093,1.571 -3.106,1.6 -3.12,1.628 -3.13,1.644 -3.136,1.645 -3.164,1.646 -3.214,1.647 -3.282,1.649 -3.364,1.65 -3.458,1.652 -3.561,1.654 -3.99,1.661 -4.033,1.762 -4.076,1.863 -2.908,1.863
  B.SilkS region: -1.248,1.863 -1.182,1.862 -1.136,1.861 -1.107,1.858 -1.091,1.854 -1.086,1.848 -1.086,1.84 -1.091,1.823 -1.101,1.784 -1.116,1.726 -1.135,1.654 -1.156,1.571 -1.179,1.48 -1.184,1.46 -1.224,1.303 -1.259,1.166 -1.29,1.049 -1.316,0.954 -1.337,0.882 -1.338,0.879 -1.345,0.872 -1.358,0.867 -1.381,0.864 -1.418,0.862 -1.471,0.86 -1.543,0.86 -1.639,0.86 -1.934,0.86 -2.084,1.051 -2.166,1.156 -2.378,1.429 -2.425,1.491 -2.588,1.703 -2.709,1.863 -2.485,1.862 -2.26,1.862 -2.196,1.771 -2.132,1.68 -1.851,1.683 -1.57,1.687 -1.551,1.775 -1.533,1.863 -1.306,1.863 hole: -1.796,1.498 -1.844,1.498 -1.908,1.497 -1.96,1.495 -1.994,1.493 -2.006,1.491 -2.005,1.488 -1.992,1.469 -1.968,1.437 -1.937,1.396 -1.915,1.368 -1.872,1.311 -1.824,1.248 -1.779,1.188 -1.745,1.143 -1.714,1.106 -1.691,1.083 -1.68,1.077 -1.679,1.08 -1.672,1.105 -1.662,1.148 -1.65,1.206 -1.637,1.273 -1.632,1.297 -1.619,1.363 -1.608,1.418 -1.599,1.458 -1.594,1.478 -1.594,1.478 -1.594,1.486 -1.603,1.491 -1.624,1.495 -1.661,1.497 -1.717,1.498
  B.SilkS region: 3.413,1.8 3.431,1.776 3.464,1.731 3.492,1.693 3.525,1.648 3.075,1.643 2.987,1.642 2.889,1.641 2.801,1.64 2.727,1.638 2.671,1.637 2.634,1.636 2.621,1.635 2.622,1.624 2.628,1.591 2.64,1.539 2.657,1.472 2.677,1.393 2.7,1.306 2.725,1.215 2.765,1.068 3.19,1.068 3.615,1.068 3.67,0.972 3.68,0.956 3.703,0.914 3.719,0.883 3.725,0.868 3.723,0.867 3.701,0.866 3.656,0.864 3.592,0.863 3.512,0.861 3.417,0.86 3.311,0.86 3.197,0.86 2.668,0.86 2.548,0.92 2.516,0.937 2.464,0.964 2.421,0.985 2.395,0.999 2.394,0.999 2.383,1.007 2.374,1.018 2.364,1.038 2.353,1.067 2.34,1.11 2.324,1.169 2.305,1.248 2.28,1.349 2.267,1.399 2.245,1.491 2.229,1.561 2.218,1.614 2.211,1.651 2.209,1.676 2.211,1.692 2.216,1.7 2.23,1.711 2.264,1.732 2.31,1.759 2.364,1.79 2.494,1.861 2.931,1.861 3.367,1.862
  B.SilkS region: 1.021,1.86 1.23,1.856 1.274,1.677 1.319,1.498 1.594,1.498 1.869,1.497 1.931,1.401 1.943,1.381 1.969,1.341 1.986,1.311 1.993,1.297 1.988,1.296 1.961,1.294 1.914,1.292 1.85,1.291 1.773,1.29 1.687,1.29 1.665,1.29 1.568,1.289 1.494,1.288 1.441,1.286 1.406,1.283 1.387,1.279 1.381,1.273 1.381,1.273 1.385,1.251 1.393,1.213 1.405,1.166 1.428,1.075 1.798,1.071 2.169,1.068 2.224,0.971 2.234,0.953 2.257,0.911 2.273,0.88 2.279,0.867 2.268,0.865 2.233,0.864 2.176,0.863 2.101,0.862 2.011,0.861 1.906,0.86 1.791,0.86 1.668,0.86 1.056,0.86 1.042,0.914 1.035,0.939 1.023,0.987 1.007,1.052 0.988,1.131 0.967,1.22 0.945,1.314 0.924,1.4 0.901,1.495 0.88,1.584 0.862,1.661 0.847,1.722 0.837,1.762 0.812,1.863
  B.SilkS region: 0.253,1.801 0.271,1.776 0.301,1.731 0.324,1.693 0.35,1.648 -0.082,1.643 -0.154,1.642 -0.252,1.641 -0.339,1.64 -0.411,1.639 -0.467,1.638 -0.503,1.637 -0.516,1.636 -0.516,1.636 -0.512,1.619 -0.503,1.581 -0.489,1.524 -0.472,1.452 -0.451,1.369 -0.428,1.277 -0.425,1.264 -0.402,1.171 -0.381,1.085 -0.362,1.01 -0.347,0.95 -0.337,0.909 -0.332,0.889 -0.325,0.859 -0.536,0.863 -0.747,0.866 -0.798,1.081 -0.798,1.082 -0.818,1.164 -0.842,1.263 -0.867,1.371 -0.893,1.479 -0.918,1.579 -0.986,1.863 0.208,1.863
LOGO#2 [mm]
  F.SilkS region: 338 vertices and 6 holes, not listed, extent -1.984,-0.109 1.983,1.224
  F.SilkS region: -1.168,-0.344 -1.125,-0.344 -1.09,-0.344 -1.064,-0.344 -1.044,-0.345 -1.03,-0.346 -1.02,-0.347 -1.015,-0.348 -1.013,-0.35 -1.013,-0.352 -1.013,-0.353 -1.017,-0.362 -1.025,-0.377 -1.034,-0.394 -1.035,-0.395 -1.053,-0.427 -1.379,-0.427 -1.39,-0.444 -1.396,-0.456 -1.398,-0.464 -1.398,-0.465 -1.392,-0.469 -1.377,-0.474 -1.353,-0.48 -1.32,-0.488 -1.278,-0.498 -1.255,-0.503 -1.221,-0.51 -1.186,-0.519 -1.153,-0.527 -1.125,-0.535 -1.116,-0.538 -1.092,-0.545 -1.077,-0.551 -1.068,-0.555 -1.064,-0.559 -1.065,-0.564 -1.065,-0.565 -1.067,-0.575 -1.069,-0.592 -1.073,-0.613 -1.074,-0.62 -1.08,-0.664 -1.122,-0.705 -1.163,-0.745 -1.63,-0.745 -1.613,-0.705 -1.596,-0.664 -1.424,-0.661 -1.383,-0.661 -1.345,-0.66 -1.312,-0.659 -1.285,-0.659 -1.266,-0.658 -1.254,-0.658 -1.252,-0.657 -1.248,-0.651 -1.242,-0.64 -1.237,-0.628 -1.235,-0.621 -1.235,-0.621 -1.239,-0.617 -1.251,-0.612 -1.273,-0.606 -1.304,-0.598 -1.345,-0.589 -1.357,-0.586 -1.406,-0.575 -1.451,-0.565 -1.49,-0.556 -1.522,-0.547 -1.547,-0.54 -1.565,-0.535 -1.573,-0.531 -1.573,-0.53 -1.572,-0.524 -1.569,-0.509 -1.564,-0.489 -1.56,-0.473 -1.552,-0.445 -1.545,-0.427 -1.539,-0.415 -1.535,-0.412 -1.526,-0.406 -1.511,-0.395 -1.491,-0.383 -1.477,-0.374 -1.431,-0.344 -1.22,-0.344
  F.SilkS region: -0.617,-0.344 -0.588,-0.344 -0.567,-0.345 -0.552,-0.346 -0.543,-0.347 -0.538,-0.349 -0.535,-0.351 -0.535,-0.353 -0.526,-0.381 -0.516,-0.419 -0.504,-0.466 -0.489,-0.521 -0.473,-0.584 -0.471,-0.592 -0.462,-0.628 -0.454,-0.661 -0.446,-0.69 -0.44,-0.713 -0.436,-0.729 -0.434,-0.736 -0.434,-0.739 -0.436,-0.741 -0.443,-0.743 -0.454,-0.744 -0.473,-0.745 -0.499,-0.745 -0.522,-0.745 -0.613,-0.745 -0.62,-0.71 -0.628,-0.675 -0.74,-0.673 -0.853,-0.672 -0.878,-0.708 -0.904,-0.744 -0.994,-0.745 -1.083,-0.745 -1.035,-0.681 -0.97,-0.596 -0.951,-0.572 -0.866,-0.462 -0.833,-0.42 -0.774,-0.344 -0.655,-0.344 hole: -0.672,-0.431 -0.676,-0.433 -0.685,-0.442 -0.698,-0.457 -0.711,-0.475 -0.729,-0.499 -0.748,-0.524 -0.766,-0.547 -0.775,-0.558 -0.787,-0.575 -0.797,-0.587 -0.802,-0.595 -0.802,-0.596 -0.797,-0.597 -0.784,-0.598 -0.763,-0.599 -0.737,-0.599 -0.718,-0.599 -0.687,-0.599 -0.664,-0.599 -0.65,-0.598 -0.641,-0.596 -0.638,-0.594 -0.637,-0.591 -0.638,-0.591 -0.64,-0.583 -0.643,-0.567 -0.648,-0.545 -0.653,-0.519 -0.655,-0.509 -0.66,-0.482 -0.665,-0.459 -0.669,-0.442 -0.671,-0.432
  F.SilkS region: 1.324,-0.344 1.367,-0.344 1.404,-0.344 1.437,-0.345 1.462,-0.346 1.48,-0.346 1.489,-0.347 1.49,-0.347 1.487,-0.353 1.481,-0.365 1.472,-0.382 1.468,-0.389 1.446,-0.427 1.276,-0.427 1.106,-0.427 1.09,-0.486 1.08,-0.522 1.071,-0.557 1.063,-0.589 1.056,-0.616 1.051,-0.636 1.048,-0.649 1.048,-0.654 1.053,-0.654 1.068,-0.655 1.091,-0.655 1.12,-0.656 1.155,-0.656 1.195,-0.657 1.23,-0.657 1.41,-0.659 1.396,-0.677 1.385,-0.692 1.372,-0.71 1.365,-0.72 1.347,-0.745 1.172,-0.744 0.998,-0.744 0.945,-0.716 0.924,-0.704 0.905,-0.693 0.892,-0.684 0.886,-0.68 0.884,-0.676 0.884,-0.67 0.884,-0.66 0.887,-0.645 0.891,-0.624 0.898,-0.596 0.907,-0.559 0.912,-0.54 0.922,-0.499 0.93,-0.468 0.936,-0.444 0.941,-0.427 0.945,-0.415 0.949,-0.407 0.953,-0.403 0.957,-0.4 0.958,-0.399 0.968,-0.394 0.985,-0.385 1.006,-0.375 1.019,-0.368 1.067,-0.344 1.278,-0.344
  F.SilkS region: 0.716,-0.344 0.762,-0.344 0.804,-0.344 0.84,-0.345 0.87,-0.345 0.893,-0.346 0.907,-0.346 0.912,-0.347 0.909,-0.352 0.903,-0.364 0.893,-0.381 0.889,-0.388 0.867,-0.427 0.719,-0.428 0.571,-0.43 0.562,-0.466 0.557,-0.485 0.554,-0.5 0.552,-0.509 0.552,-0.509 0.555,-0.511 0.562,-0.513 0.576,-0.514 0.597,-0.515 0.627,-0.516 0.666,-0.516 0.675,-0.516 0.709,-0.516 0.74,-0.516 0.765,-0.517 0.784,-0.517 0.795,-0.518 0.797,-0.519 0.794,-0.524 0.787,-0.536 0.777,-0.552 0.772,-0.56 0.748,-0.599 0.637,-0.599 0.527,-0.599 0.51,-0.671 0.492,-0.742 0.408,-0.744 0.325,-0.745 0.335,-0.705 0.339,-0.689 0.345,-0.664 0.352,-0.633 0.36,-0.598 0.37,-0.56 0.378,-0.526 0.387,-0.488 0.395,-0.452 0.403,-0.421 0.409,-0.395 0.414,-0.376 0.417,-0.365 0.422,-0.344 0.667,-0.344
  F.SilkS region: -0.133,-0.355 -0.135,-0.363 -0.139,-0.38 -0.145,-0.404 -0.152,-0.434 -0.161,-0.468 -0.17,-0.506 -0.171,-0.51 -0.18,-0.547 -0.189,-0.581 -0.196,-0.61 -0.201,-0.632 -0.205,-0.648 -0.206,-0.654 -0.206,-0.654 -0.201,-0.655 -0.187,-0.655 -0.164,-0.655 -0.135,-0.656 -0.101,-0.656 -0.062,-0.657 -0.033,-0.657 0.14,-0.659 0.13,-0.677 0.12,-0.692 0.108,-0.71 0.101,-0.72 0.083,-0.745 -0.394,-0.745 -0.367,-0.632 -0.357,-0.592 -0.347,-0.548 -0.337,-0.505 -0.327,-0.466 -0.319,-0.433 -0.319,-0.432 -0.299,-0.346 -0.214,-0.345 -0.13,-0.344
LOGO#3 [mm]
  F.SilkS region: 168 vertices and 0 holes, not listed, extent -0.749,-0.75 0.749,0.749
LQFP-100_14x14mm_P0.5mm [mm]
  rrect25% 1.6x0.3 smd paste-1.6 mask-1.6: 1(-7.675,6) 2(-7.675,5.5) 3(-7.675,5) 4(-7.675,4.5) 5(-7.675,4) 6(-7.675,3.5) 7(-7.675,3) 8(-7.675,2.5) 9(-7.675,2) 10(-7.675,1.5) 11(-7.675,1) 12(-7.675,0.5) 13(-7.675,0) 14(-7.675,-0.5) 15(-7.675,-1) 16(-7.675,-1.5) 17(-7.675,-2) 18(-7.675,-2.5) 19(-7.675,-3) 20(-7.675,-3.5) 21(-7.675,-4) 22(-7.675,-4.5) 23(-7.675,-5) 24(-7.675,-5.5) 25(-7.675,-6) 51(7.675,-6) 52(7.675,-5.5) 53(7.675,-5) 54(7.675,-4.5) 55(7.675,-4) 56(7.675,-3.5) 57(7.675,-3) 58(7.675,-2.5) 59(7.675,-2) 60(7.675,-1.5) 61(7.675,-1) 62(7.675,-0.5) 63(7.675,0) 64(7.675,0.5) 65(7.675,1) 66(7.675,1.5) 67(7.675,2) 68(7.675,2.5) 69(7.675,3) 70(7.675,3.5) 71(7.675,4) 72(7.675,4.5) 73(7.675,5) 74(7.675,5.5) 75(7.675,6)
  rrect25% 0.3x1.6 smd paste-1.6 mask-1.6: 26(-6,-7.675) 27(-5.5,-7.675) 28(-5,-7.675) 29(-4.5,-7.675) 30(-4,-7.675) 31(-3.5,-7.675) 32(-3,-7.675) 33(-2.5,-7.675) 34(-2,-7.675) 35(-1.5,-7.675) 36(-1,-7.675) 37(-0.5,-7.675) 38(0,-7.675) 39(0.5,-7.675) 40(1,-7.675) 41(1.5,-7.675) 42(2,-7.675) 43(2.5,-7.675) 44(3,-7.675) 45(3.5,-7.675) 46(4,-7.675) 47(4.5,-7.675) 48(5,-7.675) 49(5.5,-7.675) 50(6,-7.675) 76(6,7.675) 77(5.5,7.675) 78(5,7.675) 79(4.5,7.675) 80(4,7.675) 81(3.5,7.675) 82(3,7.675) 83(2.5,7.675) 84(2,7.675) 85(1.5,7.675) 86(1,7.675) 87(0.5,7.675) 88(0,7.675) 89(-0.5,7.675) 90(-1,7.675) 91(-1.5,7.675) 92(-2,7.675) 93(-2.5,7.675) 94(-3,7.675) 95(-3.5,7.675) 96(-4,7.675) 97(-4.5,7.675) 98(-5,7.675) 99(-5.5,7.675) 100(-6,7.675)
  F.SilkS region: -7.75,6.41 -8.09,6.88 -7.41,6.88
  F.SilkS lines w0.254: -7.11,-6.41 -7.11,-7.11 -6.41,-7.11 ; -7.11,6.41 -7.11,7.11 -6.41,7.11 ; 6.41,-7.11 7.11,-7.11 7.11,-6.41 ; 6.41,7.11 7.11,7.11 7.11,6.41
  F.CrtYd lines w0.254: -8.73,-6.4 -8.73,6.4 -7.25,6.4 -7.25,7.25 -6.4,7.25 -6.4,8.73 6.4,8.73 6.4,7.25 7.25,7.25 7.25,6.4 8.73,6.4 8.73,-6.4 7.25,-6.4 7.25,-7.25 6.4,-7.25 6.4,-8.73 -6.4,-8.73 -6.4,-7.25 -7.25,-7.25 -7.25,-6.4 -8.73,-6.4
MountingHole_3.2mm_M3_Pad_Via [mm]
  round 0.8 hole 0.5 paste-2539.97 mask-0.8: 1(-2.4,0) 1(-1.697,-1.697) 1(-1.697,1.697) 1(0,-2.4) 1(0,2.4) 1(1.697,-1.697) 1(1.697,1.697) 1(2.4,0)
  round 6.4 hole 3.2 paste-2539.97 mask-6.4: 1(0,0)
  Cmts.User circle w0.254: c0,0 r3.2
  F.CrtYd circle w0.254: c0,0 r3.45
Oscillator_SMD_Abracon_ASE-4Pin_3.2x2.5mm [mm]
  rrect23% 1.3x1.1 smd paste-1.3 mask-1.3: 1(-1.05,-0.825) 2(1.05,-0.825) 3(1.05,0.825) 4(-1.05,0.825)
  F.Adhes circle w0.254: c0,0 r0.25
  F.CrtYd lines w0.254: 2.1,-1.75 2.1,1.75 -2.1,1.75 -2.1,-1.75 2.1,-1.75
PQFN50P200X200X80-10N [mm]
  rrect4% 0.35x0.38 smd paste-0.38 mask-0.38: 1(-0.765,0.25) 2(-0.765,-0.25) 3(-0.5,-0.765) 4(0,-0.765) 5(0.5,-0.765) 6(0.765,-0.25) 7(0.765,0.25) 8(0.5,0.765) 9(0,0.765) 10(-0.5,0.765)
  F.SilkS circle w0.254: c-1.5,0.3 r0.1
  F.SilkS lines w0.254: 1.03,0.63 1.03,1.03 0.85,1.03 ; 1.03,-0.63 1.03,-1.03 0.85,-1.03 ; -0.85,1.03 -1.03,1.03 -1.03,0.63 ; -0.85,-1.03 -1.03,-1.03 -1.03,-0.63
  F.CrtYd lines w0.254: 1.21,1.21 -1.21,1.21 -1.21,-1.21 1.21,-1.21 1.21,1.21